# Altium PCB LED_Matrix16x16.PcbDoc
Units mm, origin at the board's own origin, x right, y up, seen from the top; angles counter-clockwise.
Board outline 132 x 132 mm, 2 copper layers (Top Layer, Bottom Layer), stack 1.586 mm thick; 258 components, 32 nets, 548 pads, 274 vias.
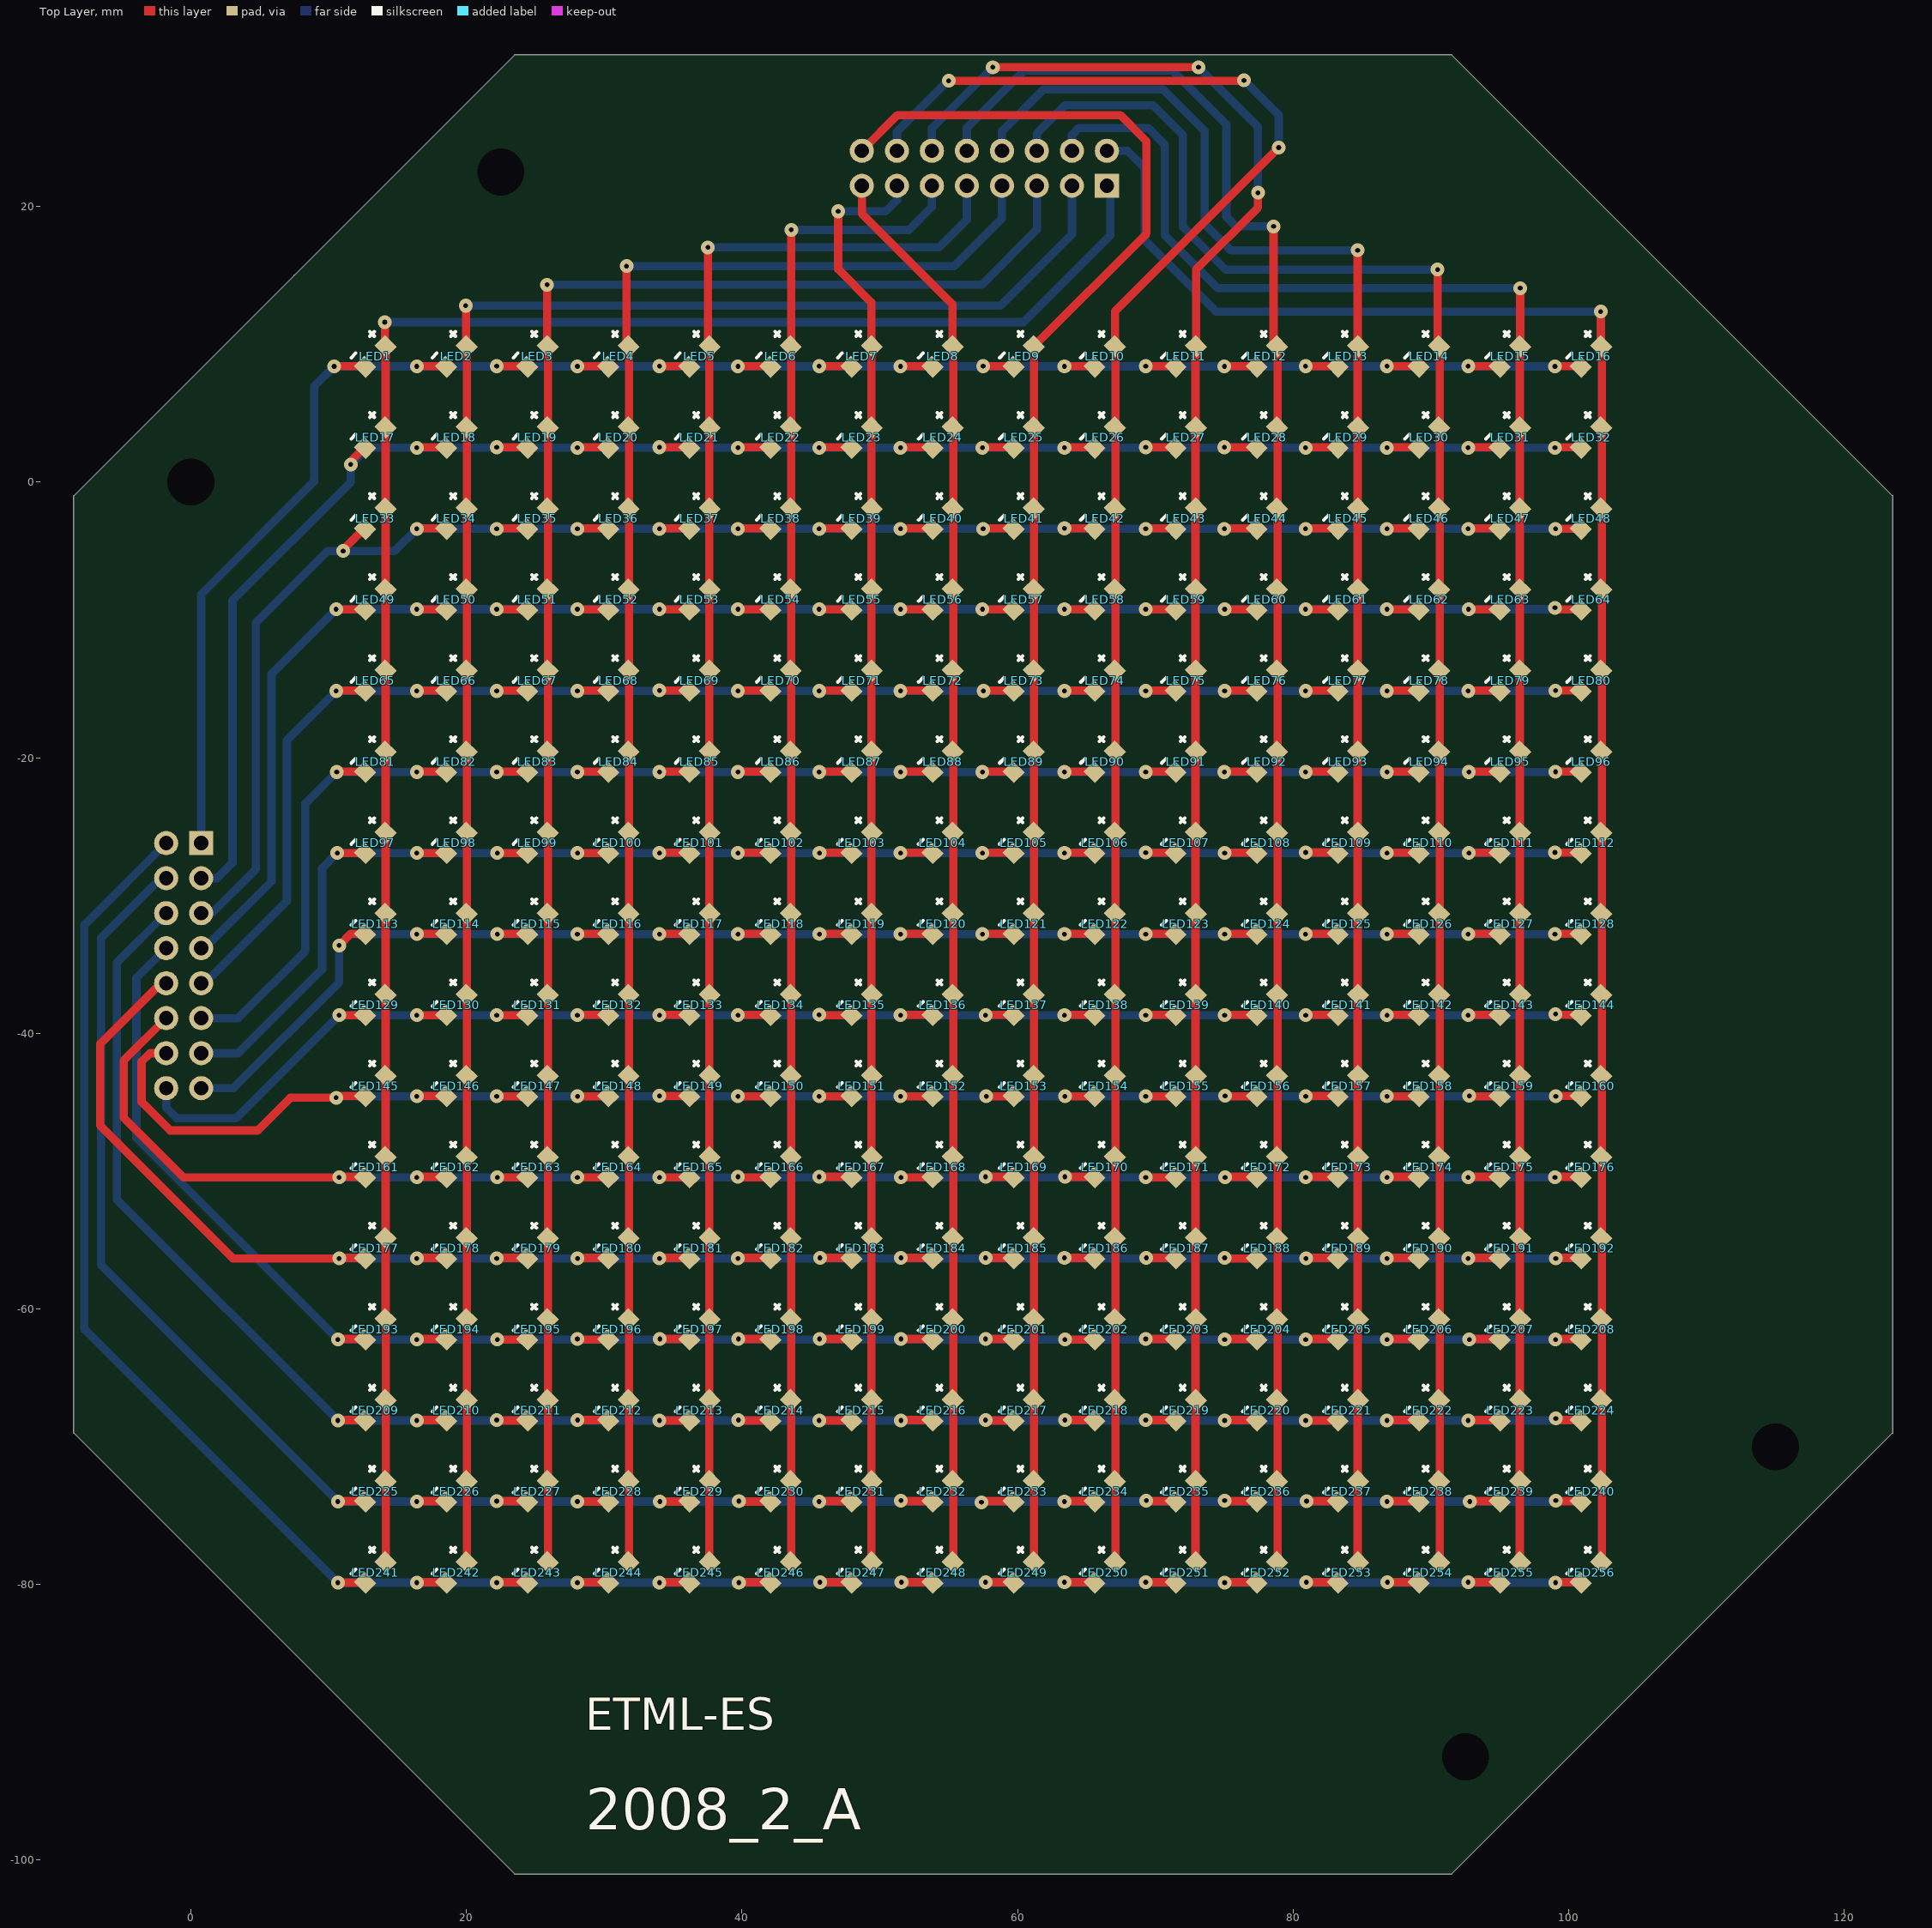
[diagram p0: Top Layer view]
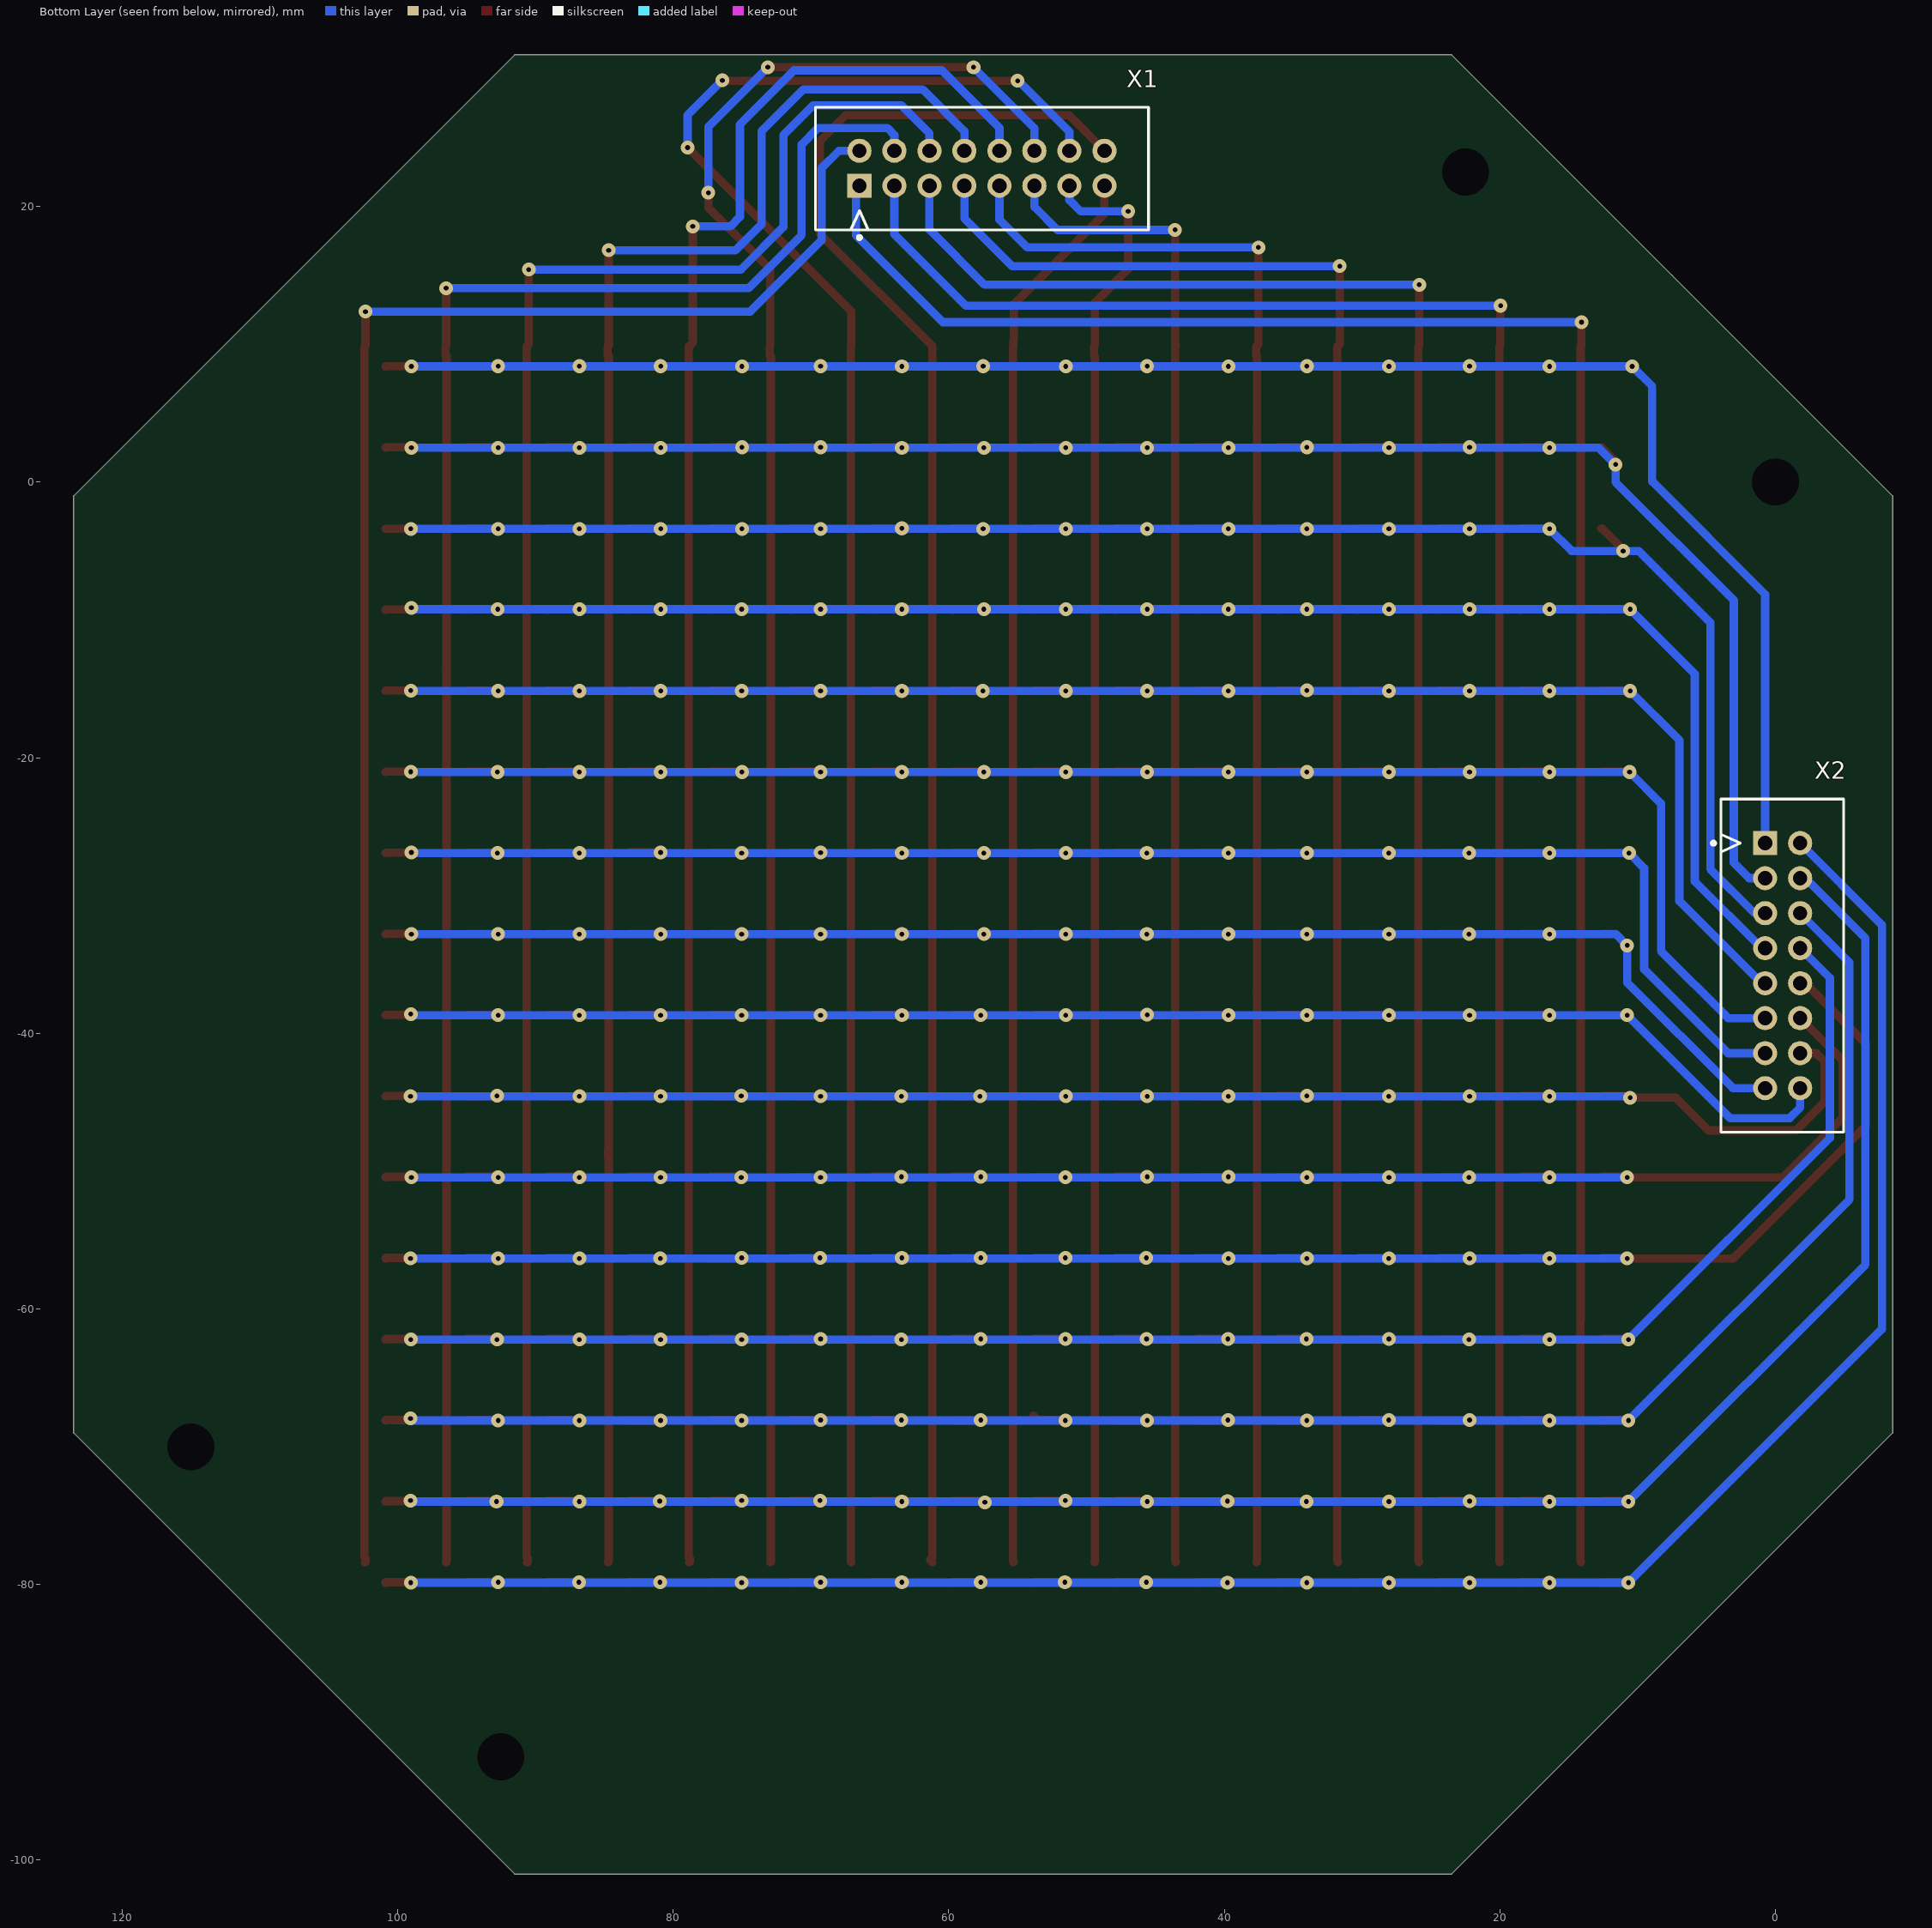
[diagram p1: Bottom Layer view, seen from below]
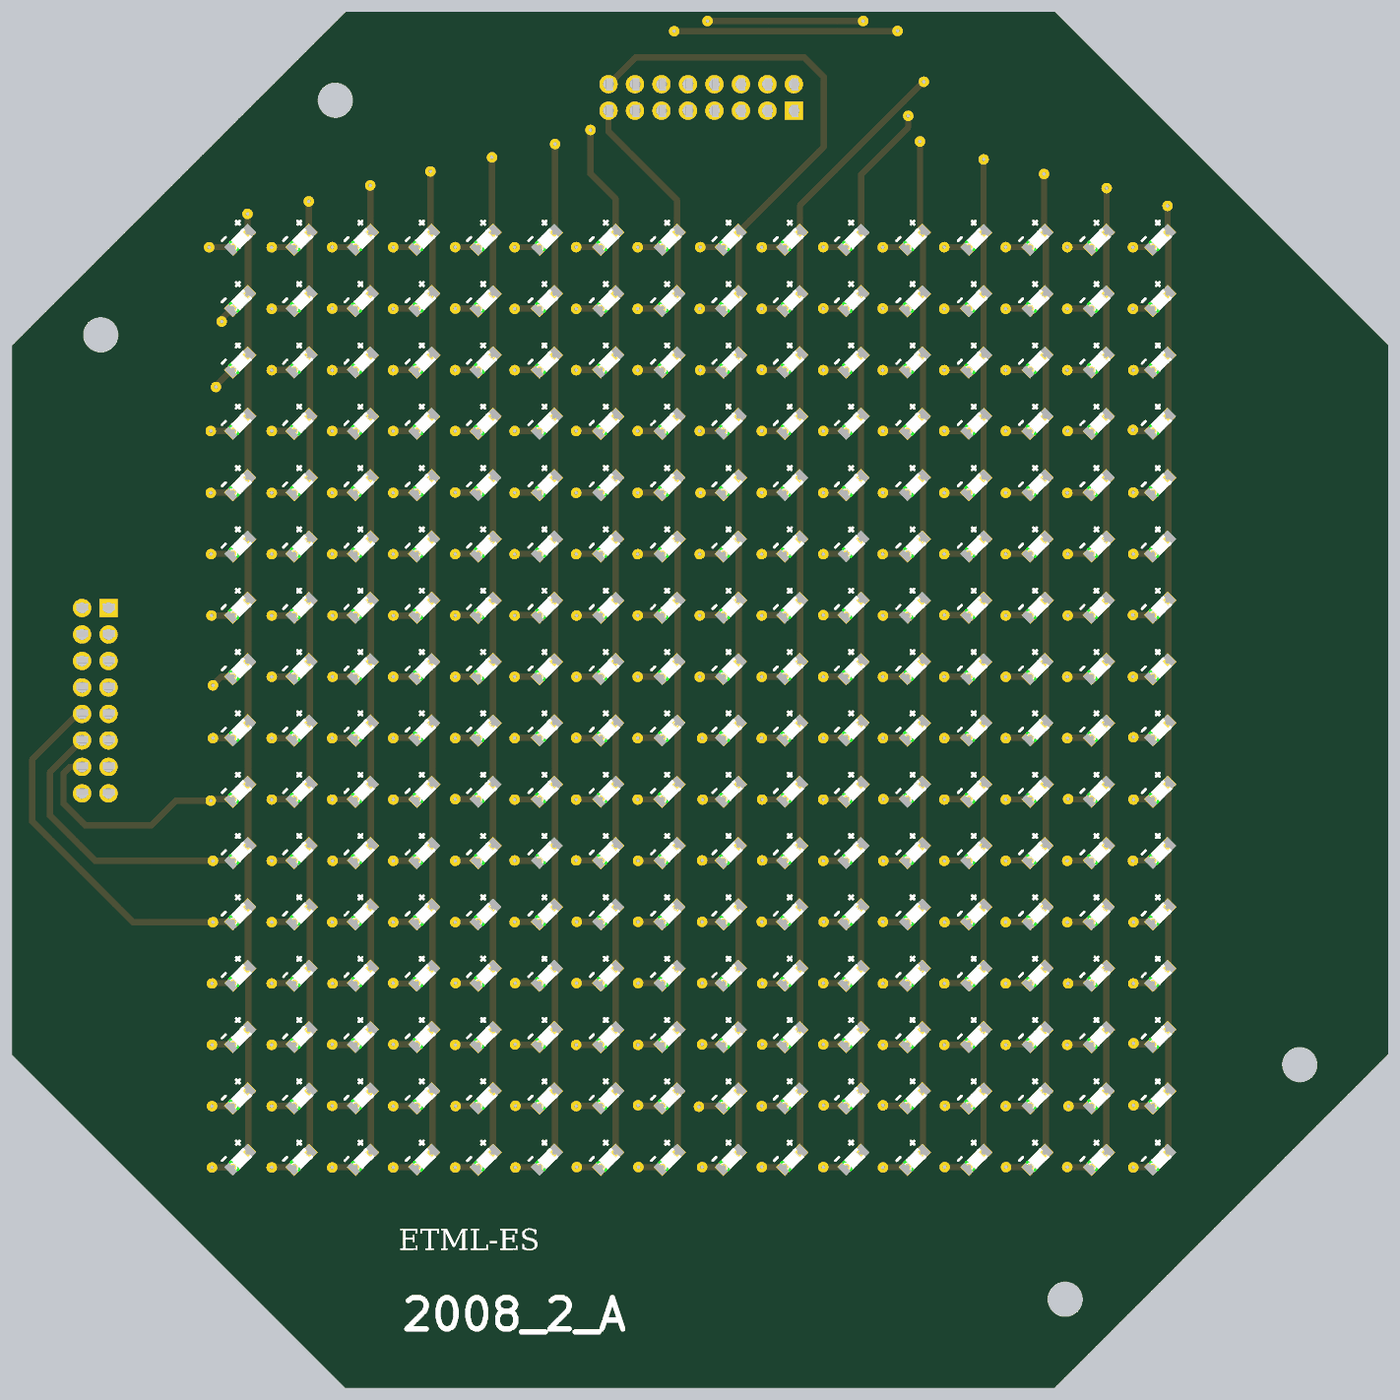
[diagram p2: 3D render of the assembled board from above, using the file's embedded part models]

## Layer stack, top to bottom
Top Solder: solder mask 0.0102, Solder Resist, Dk 3.5
Top Layer: signal copper 0.018
Dielectric1: core 1.55, FR-4, Dk 4.8
Bottom Layer: signal copper 0.018
Bottom Solder: solder mask 0.0102, Solder Resist, Dk 3.5

## Board outline
-8.5,-69 -8.5,-1 7.5,15 23.5,31 91.5,31 123.5,-1 123.5,-69 91.5,-101 23.5,-101

## Design rules (kind name [scope] priority, off if disabled: settings)
BoardOutlineClearance [All] p1: gap=0.25 ignorepadtopadclearanceinfootprint=FALSE except(0: Arc-SplitContinuation Track-SplitContinuation SMDPad-SplitContinuation THPad-SplitContinuation Via-SplitContinuation Fill-SplitContinuation Poly-SplitContinuation Region-SplitContinuation Text-SplitContinuation)
Clearance Clearance-xPP-xTP-xTT [All] p1: gap=0.15 ignorepadtopadclearanceinfootprint=FALSE except(0: Arc-Hole Track-Hole SMDPad-Hole THPad-Hole Via-Hole Fill-Hole Poly-Hole Region-Hole Text-Hole)
ComponentClearance [All] p1: gap=0.25 collisioncheckmode=3 verticalgap=0.25 showdistances=FALSE
DiffPairsRouting [All] p1: maxlimit=0.25 minlimit=0.25 mostfreqgap=0.25 toplayer_minwidth=0.381 toplayer_maxwidth=0.381 toplayer_prefwidth=0.381 bottomlayer_minwidth=0.381 bottomlayer_maxwidth=0.381 bottomlayer_prefwidth=0.381 maxuncoupledlength=12.5
Height [All] p1: minheight=0 maxheight=25 prefheight=12.5
HoleSize HoleSize-PTH [All] p1: absolutevalues=TRUE maxlimit=10 minlimit=0.25 maxpercent=80.000 minpercent=20.000
HoleToHoleClearance [All] p1: gap=0.35 allowstackedmicrovias=TRUE
MinimumAnnularRing "Minimum IAR  >0.45mm" [((ObjectKind = 'Pad') OR (ObjectKind = 'Via')) And (Layer = 'MultiLayer') And (HoleDiameter > AsMM(0.45))] p1: minimumring=0.175 // minimum inner annular ring for pads > 0.45mm finished hole size
MinimumAnnularRing "Minimum IAR <=0.45mm" [((ObjectKind = 'Pad') OR (ObjectKind = 'Via')) And (Layer = 'MultiLayer') And (HoleDiameter <= AsMM(0.45))] p2: minimumring=0.175 // minimum inner annular ring for pads <= 0.45mm finished hole size
MinimumSolderMaskSliver [All] p1: minsoldermaskwidth=0.08
PasteMaskExpansion [All] p1: expansion=-0.025
PlaneClearance PlaneClearance-IPI [All] p1: clearance=0.25
PlaneConnect [All] p1: planeconnectstyle=Relief reliefexpansion=0.175 reliefentries=4 reliefconductorwidth=0.2 reliefairgap=0.2
PolygonConnect PolygonConnect-xTW [All] p1: connectstyle=Relief reliefconductorwidth=0.2 reliefentries=4 polygonreliefangle="90 Angle" airgapwidth=0.2
RoutingCorners [All] p1: cornerstyle=45-Degree minsetback=2.5 maxsetback=2.5
RoutingVias RoutingViasES [All] p1: holewidth=0.3 width=0.65 viastyle="Through Hole" minholewidth=0.25 minwidth=0.61 maxholewidth=0.45 maxwidth=0.8 // finishet hole size <= 0.45mm
SilkToSilkClearance [All] p1: silktosilkclearance=0.2
SilkToSolderMaskClearance SilkscreenOverComponentPads [IsPad] p1: minsilkscreentomaskgap=0.2 clearancetoexposedcopper=TRUE
SolderMaskExpansion [All] p1: expansion=0
UnRoutedNet [All] p1: checkbadconnections=TRUE
Width Width-xTW [All] p1: maxlimit=1.5 minlimit=0.15 preferedwidth=0.2
17 further rules are at their usual default settings.

## Components (designator, comment, footprint, x,y, rotation, side; value= is the part's Value field where it differs from the comment)
LED1 "KPT-2012SRC-PRV" 0805_LED 13.382,9.118 r45 top
LED2 "KPT-2012SRC-PRV" 0805_LED 19.265,9.118 r45 top
LED3 "KPT-2012SRC-PRV" 0805_LED 25.147,9.118 r45 top
LED4 "KPT-2012SRC-PRV" 0805_LED 31.029,9.118 r45 top
LED5 "KPT-2012SRC-PRV" 0805_LED 36.912,9.118 r45 top
LED6 "KPT-2012SRC-PRV" 0805_LED 42.794,9.118 r45 top
LED7 "KPT-2012SRC-PRV" 0805_LED 48.676,9.118 r45 top
LED8 "KPT-2012SRC-PRV" 0805_LED 54.559,9.118 r45 top
LED9 "KPT-2012SRC-PRV" 0805_LED 60.441,9.118 r45 top
LED10 "KPT-2012SRC-PRV" 0805_LED 66.324,9.118 r45 top
LED11 "KPT-2012SRC-PRV" 0805_LED 72.206,9.118 r45 top
LED12 "KPT-2012SRC-PRV" 0805_LED 78.088,9.118 r45 top
LED13 "KPT-2012SRC-PRV" 0805_LED 83.971,9.118 r45 top
LED14 "KPT-2012SRC-PRV" 0805_LED 89.853,9.118 r45 top
LED15 "KPT-2012SRC-PRV" 0805_LED 95.735,9.118 r45 top
LED16 "KPT-2012SRC-PRV" 0805_LED 101.618,9.118 r45 top
LED17 "KPT-2012SRC-PRV" 0805_LED 13.382,3.235 r45 top
LED18 "KPT-2012SRC-PRV" 0805_LED 19.265,3.235 r45 top
LED19 "KPT-2012SRC-PRV" 0805_LED 25.147,3.235 r45 top
LED20 "KPT-2012SRC-PRV" 0805_LED 31.029,3.235 r45 top
LED21 "KPT-2012SRC-PRV" 0805_LED 36.912,3.235 r45 top
LED22 "KPT-2012SRC-PRV" 0805_LED 42.794,3.235 r45 top
LED23 "KPT-2012SRC-PRV" 0805_LED 48.676,3.235 r45 top
LED24 "KPT-2012SRC-PRV" 0805_LED 54.559,3.235 r45 top
LED25 "KPT-2012SRC-PRV" 0805_LED 60.441,3.235 r45 top
LED26 "KPT-2012SRC-PRV" 0805_LED 66.324,3.235 r45 top
LED27 "KPT-2012SRC-PRV" 0805_LED 72.206,3.235 r45 top
LED28 "KPT-2012SRC-PRV" 0805_LED 78.088,3.235 r45 top
LED29 "KPT-2012SRC-PRV" 0805_LED 83.971,3.235 r45 top
LED30 "KPT-2012SRC-PRV" 0805_LED 89.853,3.235 r45 top
LED31 "KPT-2012SRC-PRV" 0805_LED 95.735,3.235 r45 top
LED32 "KPT-2012SRC-PRV" 0805_LED 101.618,3.235 r45 top
LED33 "KPT-2012SRC-PRV" 0805_LED 13.382,-2.647 r45 top
LED34 "KPT-2012SRC-PRV" 0805_LED 19.265,-2.647 r45 top
LED35 "KPT-2012SRC-PRV" 0805_LED 25.147,-2.647 r45 top
LED36 "KPT-2012SRC-PRV" 0805_LED 31.029,-2.647 r45 top
LED37 "KPT-2012SRC-PRV" 0805_LED 36.912,-2.647 r45 top
LED38 "KPT-2012SRC-PRV" 0805_LED 42.794,-2.647 r45 top
LED39 "KPT-2012SRC-PRV" 0805_LED 48.676,-2.647 r45 top
LED40 "KPT-2012SRC-PRV" 0805_LED 54.559,-2.647 r45 top
LED41 "KPT-2012SRC-PRV" 0805_LED 60.441,-2.647 r45 top
LED42 "KPT-2012SRC-PRV" 0805_LED 66.324,-2.647 r45 top
LED43 "KPT-2012SRC-PRV" 0805_LED 72.206,-2.647 r45 top
LED44 "KPT-2012SRC-PRV" 0805_LED 78.088,-2.647 r45 top
LED45 "KPT-2012SRC-PRV" 0805_LED 83.971,-2.647 r45 top
LED46 "KPT-2012SRC-PRV" 0805_LED 89.853,-2.647 r45 top
LED47 "KPT-2012SRC-PRV" 0805_LED 95.735,-2.647 r45 top
LED48 "KPT-2012SRC-PRV" 0805_LED 101.618,-2.647 r45 top
LED49 "KPT-2012SRC-PRV" 0805_LED 13.382,-8.529 r45 top
LED50 "KPT-2012SRC-PRV" 0805_LED 19.265,-8.529 r45 top
LED51 "KPT-2012SRC-PRV" 0805_LED 25.147,-8.529 r45 top
LED52 "KPT-2012SRC-PRV" 0805_LED 31.029,-8.529 r45 top
LED53 "KPT-2012SRC-PRV" 0805_LED 36.912,-8.529 r45 top
LED54 "KPT-2012SRC-PRV" 0805_LED 42.794,-8.529 r45 top
LED55 "KPT-2012SRC-PRV" 0805_LED 48.676,-8.529 r45 top
LED56 "KPT-2012SRC-PRV" 0805_LED 54.559,-8.529 r45 top
LED57 "KPT-2012SRC-PRV" 0805_LED 60.441,-8.529 r45 top
LED58 "KPT-2012SRC-PRV" 0805_LED 66.324,-8.529 r45 top
LED59 "KPT-2012SRC-PRV" 0805_LED 72.206,-8.529 r45 top
LED60 "KPT-2012SRC-PRV" 0805_LED 78.088,-8.529 r45 top
LED61 "KPT-2012SRC-PRV" 0805_LED 83.971,-8.529 r45 top
LED62 "KPT-2012SRC-PRV" 0805_LED 89.853,-8.529 r45 top
LED63 "KPT-2012SRC-PRV" 0805_LED 95.735,-8.529 r45 top
LED64 "KPT-2012SRC-PRV" 0805_LED 101.618,-8.529 r45 top
LED65 "KPT-2012SRC-PRV" 0805_LED 13.382,-14.412 r45 top
LED66 "KPT-2012SRC-PRV" 0805_LED 19.265,-14.412 r45 top
LED67 "KPT-2012SRC-PRV" 0805_LED 25.147,-14.412 r45 top
LED68 "KPT-2012SRC-PRV" 0805_LED 31.029,-14.412 r45 top
LED69 "KPT-2012SRC-PRV" 0805_LED 36.912,-14.412 r45 top
LED70 "KPT-2012SRC-PRV" 0805_LED 42.794,-14.412 r45 top
LED71 "KPT-2012SRC-PRV" 0805_LED 48.676,-14.412 r45 top
LED72 "KPT-2012SRC-PRV" 0805_LED 54.559,-14.412 r45 top
LED73 "KPT-2012SRC-PRV" 0805_LED 60.441,-14.412 r45 top
LED74 "KPT-2012SRC-PRV" 0805_LED 66.324,-14.412 r45 top
LED75 "KPT-2012SRC-PRV" 0805_LED 72.206,-14.412 r45 top
LED76 "KPT-2012SRC-PRV" 0805_LED 78.088,-14.412 r45 top
LED77 "KPT-2012SRC-PRV" 0805_LED 83.971,-14.412 r45 top
LED78 "KPT-2012SRC-PRV" 0805_LED 89.853,-14.412 r45 top
LED79 "KPT-2012SRC-PRV" 0805_LED 95.735,-14.412 r45 top
LED80 "KPT-2012SRC-PRV" 0805_LED 101.618,-14.412 r45 top
LED81 "KPT-2012SRC-PRV" 0805_LED 13.382,-20.294 r45 top
LED82 "KPT-2012SRC-PRV" 0805_LED 19.265,-20.294 r45 top
LED83 "KPT-2012SRC-PRV" 0805_LED 25.147,-20.294 r45 top
LED84 "KPT-2012SRC-PRV" 0805_LED 31.029,-20.294 r45 top
LED85 "KPT-2012SRC-PRV" 0805_LED 36.912,-20.294 r45 top
LED86 "KPT-2012SRC-PRV" 0805_LED 42.794,-20.294 r45 top
LED87 "KPT-2012SRC-PRV" 0805_LED 48.676,-20.294 r45 top
LED88 "KPT-2012SRC-PRV" 0805_LED 54.559,-20.294 r45 top
LED89 "KPT-2012SRC-PRV" 0805_LED 60.441,-20.294 r45 top
LED90 "KPT-2012SRC-PRV" 0805_LED 66.324,-20.294 r45 top
LED91 "KPT-2012SRC-PRV" 0805_LED 72.206,-20.294 r45 top
LED92 "KPT-2012SRC-PRV" 0805_LED 78.088,-20.294 r45 top
LED93 "KPT-2012SRC-PRV" 0805_LED 83.971,-20.294 r45 top
LED94 "KPT-2012SRC-PRV" 0805_LED 89.853,-20.294 r45 top
LED95 "KPT-2012SRC-PRV" 0805_LED 95.735,-20.294 r45 top
LED96 "KPT-2012SRC-PRV" 0805_LED 101.618,-20.294 r45 top
LED97 "KPT-2012SRC-PRV" 0805_LED 13.382,-26.176 r45 top
LED98 "KPT-2012SRC-PRV" 0805_LED 19.265,-26.176 r45 top
LED99 "KPT-2012SRC-PRV" 0805_LED 25.147,-26.176 r45 top
LED100 "KPT-2012SRC-PRV" 0805_LED 31.029,-26.176 r45 top
LED101 "KPT-2012SRC-PRV" 0805_LED 36.912,-26.176 r45 top
LED102 "KPT-2012SRC-PRV" 0805_LED 42.794,-26.176 r45 top
LED103 "KPT-2012SRC-PRV" 0805_LED 48.676,-26.176 r45 top
LED104 "KPT-2012SRC-PRV" 0805_LED 54.559,-26.176 r45 top
LED105 "KPT-2012SRC-PRV" 0805_LED 60.441,-26.176 r45 top
LED106 "KPT-2012SRC-PRV" 0805_LED 66.324,-26.176 r45 top
LED107 "KPT-2012SRC-PRV" 0805_LED 72.206,-26.176 r45 top
LED108 "KPT-2012SRC-PRV" 0805_LED 78.088,-26.176 r45 top
LED109 "KPT-2012SRC-PRV" 0805_LED 83.971,-26.176 r45 top
LED110 "KPT-2012SRC-PRV" 0805_LED 89.853,-26.176 r45 top
LED111 "KPT-2012SRC-PRV" 0805_LED 95.735,-26.176 r45 top
LED112 "KPT-2012SRC-PRV" 0805_LED 101.618,-26.176 r45 top
LED113 "KPT-2012SRC-PRV" 0805_LED 13.382,-32.059 r45 top
LED114 "KPT-2012SRC-PRV" 0805_LED 19.265,-32.059 r45 top
LED115 "KPT-2012SRC-PRV" 0805_LED 25.147,-32.059 r45 top
LED116 "KPT-2012SRC-PRV" 0805_LED 31.029,-32.059 r45 top
LED117 "KPT-2012SRC-PRV" 0805_LED 36.912,-32.059 r45 top
LED118 "KPT-2012SRC-PRV" 0805_LED 42.794,-32.059 r45 top
LED119 "KPT-2012SRC-PRV" 0805_LED 48.676,-32.059 r45 top
LED120 "KPT-2012SRC-PRV" 0805_LED 54.559,-32.059 r45 top
LED121 "KPT-2012SRC-PRV" 0805_LED 60.441,-32.059 r45 top
LED122 "KPT-2012SRC-PRV" 0805_LED 66.324,-32.059 r45 top
LED123 "KPT-2012SRC-PRV" 0805_LED 72.206,-32.059 r45 top
LED124 "KPT-2012SRC-PRV" 0805_LED 78.088,-32.059 r45 top
LED125 "KPT-2012SRC-PRV" 0805_LED 83.971,-32.059 r45 top
LED126 "KPT-2012SRC-PRV" 0805_LED 89.853,-32.059 r45 top
LED127 "KPT-2012SRC-PRV" 0805_LED 95.735,-32.059 r45 top
LED128 "KPT-2012SRC-PRV" 0805_LED 101.618,-32.059 r45 top
LED129 "KPT-2012SRC-PRV" 0805_LED 13.382,-37.941 r45 top
LED130 "KPT-2012SRC-PRV" 0805_LED 19.265,-37.941 r45 top
LED131 "KPT-2012SRC-PRV" 0805_LED 25.147,-37.941 r45 top
LED132 "KPT-2012SRC-PRV" 0805_LED 31.029,-37.941 r45 top
LED133 "KPT-2012SRC-PRV" 0805_LED 36.912,-37.941 r45 top
LED134 "KPT-2012SRC-PRV" 0805_LED 42.794,-37.941 r45 top
LED135 "KPT-2012SRC-PRV" 0805_LED 48.676,-37.941 r45 top
LED136 "KPT-2012SRC-PRV" 0805_LED 54.559,-37.941 r45 top
LED137 "KPT-2012SRC-PRV" 0805_LED 60.441,-37.941 r45 top
LED138 "KPT-2012SRC-PRV" 0805_LED 66.324,-37.941 r45 top
LED139 "KPT-2012SRC-PRV" 0805_LED 72.206,-37.941 r45 top
LED140 "KPT-2012SRC-PRV" 0805_LED 78.088,-37.941 r45 top
LED141 "KPT-2012SRC-PRV" 0805_LED 83.971,-37.941 r45 top
LED142 "KPT-2012SRC-PRV" 0805_LED 89.853,-37.941 r45 top
LED143 "KPT-2012SRC-PRV" 0805_LED 95.735,-37.941 r45 top
LED144 "KPT-2012SRC-PRV" 0805_LED 101.618,-37.941 r45 top
LED145 "KPT-2012SRC-PRV" 0805_LED 13.382,-43.824 r45 top
LED146 "KPT-2012SRC-PRV" 0805_LED 19.265,-43.824 r45 top
LED147 "KPT-2012SRC-PRV" 0805_LED 25.147,-43.824 r45 top
LED148 "KPT-2012SRC-PRV" 0805_LED 31.029,-43.824 r45 top
LED149 "KPT-2012SRC-PRV" 0805_LED 36.912,-43.824 r45 top
LED150 "KPT-2012SRC-PRV" 0805_LED 42.794,-43.824 r45 top
LED151 "KPT-2012SRC-PRV" 0805_LED 48.676,-43.824 r45 top
LED152 "KPT-2012SRC-PRV" 0805_LED 54.559,-43.824 r45 top
LED153 "KPT-2012SRC-PRV" 0805_LED 60.441,-43.824 r45 top
LED154 "KPT-2012SRC-PRV" 0805_LED 66.324,-43.824 r45 top
LED155 "KPT-2012SRC-PRV" 0805_LED 72.206,-43.824 r45 top
LED156 "KPT-2012SRC-PRV" 0805_LED 78.088,-43.824 r45 top
LED157 "KPT-2012SRC-PRV" 0805_LED 83.971,-43.824 r45 top
LED158 "KPT-2012SRC-PRV" 0805_LED 89.853,-43.824 r45 top
LED159 "KPT-2012SRC-PRV" 0805_LED 95.735,-43.824 r45 top
LED160 "KPT-2012SRC-PRV" 0805_LED 101.618,-43.824 r45 top
LED161 "KPT-2012SRC-PRV" 0805_LED 13.382,-49.706 r45 top
LED162 "KPT-2012SRC-PRV" 0805_LED 19.265,-49.706 r45 top
LED163 "KPT-2012SRC-PRV" 0805_LED 25.147,-49.706 r45 top
LED164 "KPT-2012SRC-PRV" 0805_LED 31.029,-49.706 r45 top
LED165 "KPT-2012SRC-PRV" 0805_LED 36.912,-49.706 r45 top
LED166 "KPT-2012SRC-PRV" 0805_LED 42.794,-49.706 r45 top
LED167 "KPT-2012SRC-PRV" 0805_LED 48.676,-49.706 r45 top
LED168 "KPT-2012SRC-PRV" 0805_LED 54.559,-49.706 r45 top
LED169 "KPT-2012SRC-PRV" 0805_LED 60.441,-49.706 r45 top
LED170 "KPT-2012SRC-PRV" 0805_LED 66.324,-49.706 r45 top
LED171 "KPT-2012SRC-PRV" 0805_LED 72.206,-49.706 r45 top
LED172 "KPT-2012SRC-PRV" 0805_LED 78.088,-49.706 r45 top
LED173 "KPT-2012SRC-PRV" 0805_LED 83.971,-49.706 r45 top
LED174 "KPT-2012SRC-PRV" 0805_LED 89.853,-49.706 r45 top
LED175 "KPT-2012SRC-PRV" 0805_LED 95.735,-49.706 r45 top
LED176 "KPT-2012SRC-PRV" 0805_LED 101.618,-49.706 r45 top
LED177 "KPT-2012SRC-PRV" 0805_LED 13.382,-55.588 r45 top
LED178 "KPT-2012SRC-PRV" 0805_LED 19.265,-55.588 r45 top
LED179 "KPT-2012SRC-PRV" 0805_LED 25.147,-55.588 r45 top
LED180 "KPT-2012SRC-PRV" 0805_LED 31.029,-55.588 r45 top
LED181 "KPT-2012SRC-PRV" 0805_LED 36.912,-55.588 r45 top
LED182 "KPT-2012SRC-PRV" 0805_LED 42.794,-55.588 r45 top
LED183 "KPT-2012SRC-PRV" 0805_LED 48.676,-55.588 r45 top
LED184 "KPT-2012SRC-PRV" 0805_LED 54.559,-55.588 r45 top
LED185 "KPT-2012SRC-PRV" 0805_LED 60.441,-55.588 r45 top
LED186 "KPT-2012SRC-PRV" 0805_LED 66.324,-55.588 r45 top
LED187 "KPT-2012SRC-PRV" 0805_LED 72.206,-55.588 r45 top
LED188 "KPT-2012SRC-PRV" 0805_LED 78.088,-55.588 r45 top
LED189 "KPT-2012SRC-PRV" 0805_LED 83.971,-55.588 r45 top
LED190 "KPT-2012SRC-PRV" 0805_LED 89.853,-55.588 r45 top
LED191 "KPT-2012SRC-PRV" 0805_LED 95.735,-55.588 r45 top
LED192 "KPT-2012SRC-PRV" 0805_LED 101.618,-55.588 r45 top
LED193 "KPT-2012SRC-PRV" 0805_LED 13.382,-61.471 r45 top
LED194 "KPT-2012SRC-PRV" 0805_LED 19.265,-61.471 r45 top
LED195 "KPT-2012SRC-PRV" 0805_LED 25.147,-61.471 r45 top
LED196 "KPT-2012SRC-PRV" 0805_LED 31.029,-61.471 r45 top
LED197 "KPT-2012SRC-PRV" 0805_LED 36.912,-61.471 r45 top
LED198 "KPT-2012SRC-PRV" 0805_LED 42.794,-61.471 r45 top
LED199 "KPT-2012SRC-PRV" 0805_LED 48.676,-61.471 r45 top
LED200 "KPT-2012SRC-PRV" 0805_LED 54.559,-61.471 r45 top
LED201 "KPT-2012SRC-PRV" 0805_LED 60.441,-61.471 r45 top
LED202 "KPT-2012SRC-PRV" 0805_LED 66.324,-61.471 r45 top
LED203 "KPT-2012SRC-PRV" 0805_LED 72.206,-61.471 r45 top
LED204 "KPT-2012SRC-PRV" 0805_LED 78.088,-61.471 r45 top
LED205 "KPT-2012SRC-PRV" 0805_LED 83.971,-61.471 r45 top
LED206 "KPT-2012SRC-PRV" 0805_LED 89.853,-61.471 r45 top
LED207 "KPT-2012SRC-PRV" 0805_LED 95.735,-61.471 r45 top
LED208 "KPT-2012SRC-PRV" 0805_LED 101.618,-61.471 r45 top
LED209 "KPT-2012SRC-PRV" 0805_LED 13.382,-67.353 r45 top
LED210 "KPT-2012SRC-PRV" 0805_LED 19.265,-67.353 r45 top
LED211 "KPT-2012SRC-PRV" 0805_LED 25.147,-67.353 r45 top
LED212 "KPT-2012SRC-PRV" 0805_LED 31.029,-67.353 r45 top
LED213 "KPT-2012SRC-PRV" 0805_LED 36.912,-67.353 r45 top
LED214 "KPT-2012SRC-PRV" 0805_LED 42.794,-67.353 r45 top
LED215 "KPT-2012SRC-PRV" 0805_LED 48.676,-67.353 r45 top
LED216 "KPT-2012SRC-PRV" 0805_LED 54.559,-67.353 r45 top
LED217 "KPT-2012SRC-PRV" 0805_LED 60.441,-67.353 r45 top
LED218 "KPT-2012SRC-PRV" 0805_LED 66.324,-67.353 r45 top
LED219 "KPT-2012SRC-PRV" 0805_LED 72.206,-67.353 r45 top
LED220 "KPT-2012SRC-PRV" 0805_LED 78.088,-67.353 r45 top
LED221 "KPT-2012SRC-PRV" 0805_LED 83.971,-67.353 r45 top
LED222 "KPT-2012SRC-PRV" 0805_LED 89.853,-67.353 r45 top
LED223 "KPT-2012SRC-PRV" 0805_LED 95.735,-67.353 r45 top
LED224 "KPT-2012SRC-PRV" 0805_LED 101.618,-67.353 r45 top
LED225 "KPT-2012SRC-PRV" 0805_LED 13.382,-73.235 r45 top
LED226 "KPT-2012SRC-PRV" 0805_LED 19.265,-73.235 r45 top
LED227 "KPT-2012SRC-PRV" 0805_LED 25.147,-73.235 r45 top
LED228 "KPT-2012SRC-PRV" 0805_LED 31.029,-73.235 r45 top
LED229 "KPT-2012SRC-PRV" 0805_LED 36.912,-73.235 r45 top
LED230 "KPT-2012SRC-PRV" 0805_LED 42.794,-73.235 r45 top
LED231 "KPT-2012SRC-PRV" 0805_LED 48.676,-73.235 r45 top
LED232 "KPT-2012SRC-PRV" 0805_LED 54.559,-73.235 r45 top
LED233 "KPT-2012SRC-PRV" 0805_LED 60.441,-73.235 r45 top
LED234 "KPT-2012SRC-PRV" 0805_LED 66.324,-73.235 r45 top
LED235 "KPT-2012SRC-PRV" 0805_LED 72.206,-73.235 r45 top
LED236 "KPT-2012SRC-PRV" 0805_LED 78.088,-73.235 r45 top
LED237 "KPT-2012SRC-PRV" 0805_LED 83.971,-73.235 r45 top
LED238 "KPT-2012SRC-PRV" 0805_LED 89.853,-73.235 r45 top
LED239 "KPT-2012SRC-PRV" 0805_LED 95.735,-73.235 r45 top
LED240 "KPT-2012SRC-PRV" 0805_LED 101.618,-73.235 r45 top
LED241 "KPT-2012SRC-PRV" 0805_LED 13.382,-79.118 r45 top
LED242 "KPT-2012SRC-PRV" 0805_LED 19.265,-79.118 r45 top
LED243 "KPT-2012SRC-PRV" 0805_LED 25.147,-79.118 r45 top
LED244 "KPT-2012SRC-PRV" 0805_LED 31.029,-79.118 r45 top
LED245 "KPT-2012SRC-PRV" 0805_LED 36.912,-79.118 r45 top
LED246 "KPT-2012SRC-PRV" 0805_LED 42.794,-79.118 r45 top
LED247 "KPT-2012SRC-PRV" 0805_LED 48.676,-79.118 r45 top
LED248 "KPT-2012SRC-PRV" 0805_LED 54.559,-79.118 r45 top
LED249 "KPT-2012SRC-PRV" 0805_LED 60.441,-79.118 r45 top
LED250 "KPT-2012SRC-PRV" 0805_LED 66.324,-79.118 r45 top
LED251 "KPT-2012SRC-PRV" 0805_LED 72.206,-79.118 r45 top
LED252 "KPT-2012SRC-PRV" 0805_LED 78.088,-79.118 r45 top
LED253 "KPT-2012SRC-PRV" 0805_LED 83.971,-79.118 r45 top
LED254 "KPT-2012SRC-PRV" 0805_LED 89.853,-79.118 r45 top
LED255 "KPT-2012SRC-PRV" 0805_LED 95.735,-79.118 r45 top
LED256 "KPT-2012SRC-PRV" 0805_LED 101.618,-79.118 r45 top
X1 "Anodes" CON8X8(EDITED) 66.48,21.5 r180 bottom
X2 "Cathodes" CON8X8(EDITED) 0.75,-26.2 r270 bottom

## Footprints (in the part's own frame and the unit in brackets; to place one, negate y for a bottom-side part, rotate by r counter-clockwise, add the part's x,y. Pads: shape width x height; smd on the part's side, far side on the other; paste and mask are expansions set on the pad)
0805_LED [mm] "Chip LED, 2-Leads, Body 2.0x1.3mm, IPC Medium Density"
  rect 1.1x1.2 smd: 1(-1.05,0) 2(1.05,0)
  silkscreen extent -1.3,1.09 1.22,1.55, body extent -1,-0.62 1,0.63, height 0.68
CON8X8(EDITED) [mm] "2.54mm pitch, 16 pin, header;shrouded"
  rect 1.75x1.75 / inner round 1.75 / far side rect 1.75x1.75 hole 1.05 mask+0: 1(0,0)
  round 1.75 hole 1.05 mask+0: 2(2.54,0) 3(5.08,0) 4(7.62,0) 5(10.16,0) 6(12.7,0) 7(15.24,0) 8(17.78,0) 9(17.78,2.54) 10(15.24,2.54) 11(12.7,2.54) 12(10.16,2.54) 13(7.62,2.54) 14(5.08,2.54) 15(2.54,2.54) 16(0,2.54)
  silkscreen extent -3.2,-3.87 20.98,5.7, body extent -1.37,-1.27 18.95,3.76, height 9.59

## Part data
X1 X2: library part "Mâle DIN 8 x 8"

## Free pads (board coordinates)
  round 1.524 hole 3.4 unplated: 2(0,0) 2(22.5,22.5) 2(92.5,-92.5) 2(115,-70)

## Via types
v1: diameter 1, hole 0.35, Top Layer to Bottom Layer, 274 vias

## Nets (pads, with @x,y where several pads share a name; then routed paths per layer and width w, separated by ;. In a path a pad name is that pad's centre, name@x,y a point inside that pad or via, vN(x,y) a via of type N, cw(c..) or ccw(c..) an arc to the next point about the centre after c; other vN are vias at no path point)
NetLED1_1: LED1.1 LED2.1 LED3.1 LED4.1 LED5.1 LED6.1 LED7.1 LED8.1 LED9.1 LED10.1 LED11.1 LED12.1 LED13.1 LED14.1 LED15.1 LED16.1 X2.1 | length 163.1
  Top Layer w0.6: v1(10.4,8.4) 10.411,8.411 12.605,8.411 LED1.1 ; v1(16.4,8.4) 16.411,8.411 18.487,8.411 LED2.1 ; v1(22.2,8.411) 24.369,8.411 LED3.1 ; v1(28.05,8.4) 28.061,8.411 30.252,8.411 LED4.1 ; v1(34,8.411) 36.134,8.411 LED5.1 ; v1(39.7,8.4) 39.711,8.411 42.016,8.411 LED6.1 ; v1(45.6,8.411) 47.899,8.411 LED7.1@47.934,8.375 ; v1(51.5,8.4) 51.511,8.411 53.781,8.411 LED8.1 ; v1(57.5,8.411) 59.663,8.411 LED9.1 ; v1(63.4,8.4) 63.411,8.411 65.546,8.411 LED10.1 ; v1(69.3,8.411) 71.428,8.411 LED11.1 ; v1(75,8.4) 75.01,8.411 77.31,8.411 LED12.1 ; v1(80.9,8.411) 83.193,8.411 LED13.1 ; v1(86.8,8.411) 89.075,8.411 LED14.1 ; v1(92.7,8.411) 94.957,8.411 LED15.1 ; v1(99,8.4) 99.01,8.411 100.84,8.411 LED16.1@100.875,8.375
  Bottom Layer w0.6: X2.1 0.75,-8.15 8.95,0.05 8.95,6.95 v1(10.4,8.4) v1(16.4,8.4) v1(28.05,8.4) v1(39.7,8.4) v1(51.5,8.4) v1(63.4,8.4) v1(75,8.4) v1(99,8.4)
NetLED1_2: LED1.2 LED17.2 LED33.2 LED49.2 LED65.2 LED81.2 LED97.2 LED113.2 LED129.2 LED145.2 LED161.2 LED177.2 LED193.2 LED209.2 LED225.2 LED241.2 X1.1 | length 219.6
  Top Layer w0.6: v1(14.075,11.6) 14.089,11.586 14.089,9.895 LED1.2 LED17.2 LED33.2 LED49.2 LED65.2 LED145.2 LED177.2 LED193.2 ; LED241.2@14.125,-78.34 LED241.2 14.16,-78.34 14.16,-66.61 14.16,-37.199 LED1.2@14.16,9.825
  Bottom Layer w0.6: v1(14.075,11.6) 60.425,11.6 66.725,17.9 66.725,21.255 X1.1
NetLED2_2: LED2.2 LED18.2 LED34.2 LED50.2 LED66.2 LED82.2 LED98.2 LED114.2 LED130.2 LED146.2 LED162.2 LED178.2 LED194.2 LED210.2 LED226.2 LED242.2 X1.2 | length 140.9
  Top Layer w0.6: v1(19.95,12.8) 19.972,12.778 19.972,9.895 LED2.2 20.043,9.825 20.043,-7.787 20.043,-13.669 20.043,-25.434 20.043,-43.081 20.043,-78.34 LED242.2
  Bottom Layer w0.6: v1(19.95,12.8) 58.749,12.8 63.94,17.991 X1.2
NetLED3_2: LED3.2 LED19.2 LED35.2 LED51.2 LED67.2 LED83.2 LED99.2 LED115.2 LED131.2 LED147.2 LED163.2 LED179.2 LED195.2 LED211.2 LED227.2 LED243.2 X1.3 | length 133.2
  Top Layer w0.6: v1(25.85,14.325) 25.85,9.9 LED3.2 25.925,9.825 25.925,-1.905 25.925,-19.552 25.925,-31.316 25.925,-48.963 25.925,-60.728 25.925,-78.269 25.854,-78.34 LED243.2
  Bottom Layer w0.6: v1(25.85,14.325) 57.4,14.325 61.4,18.325 X1.3
NetLED4_2: LED4.2 LED20.2 LED36.2 LED52.2 LED68.2 LED84.2 LED100.2 LED116.2 LED132.2 LED148.2 LED164.2 LED180.2 LED196.2 LED212.2 LED228.2 LED244.2 X1.4 | length 125.2
  Top Layer w0.6: v1(31.625,15.675) 31.625,10.007 LED4.2 31.807,9.825 31.807,-1.905 31.807,-13.669 31.807,-37.199 31.807,-66.61 31.807,-78.269 31.737,-78.34 LED244.2
  Bottom Layer w0.6: v1(31.625,15.675) 55.4,15.675 58.86,19.135 X1.4
NetLED5_2: LED5.2 LED21.2 LED37.2 LED53.2 LED69.2 LED85.2 LED101.2 LED117.2 LED133.2 LED149.2 LED165.2 LED181.2 LED197.2 LED213.2 LED229.2 LED245.2 X1.5 | length 124.6
  Top Layer w0.6: v1(37.525,17.025) 37.525,9.989 LED5.2 LED5.2@37.69,9.825 ; LED245.2 37.619,-78.34 LED133.2@37.619,-37.163 ; LED133.2 LED133.2@37.619,-37.163 ; LED37.2 LED37.2@37.619,-1.869 ; LED21.2 LED21.2@37.619,4.013 ; LED133.2@37.619,-37.163 37.619,-36.2 ; LED133.2@37.619,-37.163 37.619,-36.2 ; 37.619,-36.2 37.619,-13.669 LED37.2@37.619,-1.869 ; LED37.2@37.619,-1.869 37.619,-0.55 LED21.2@37.619,4.013 ; LED21.2@37.619,4.013 37.619,4.85 ; LED21.2@37.619,4.013 37.619,4.85 ; 37.619,4.85 37.619,9.118 ; 37.619,4.85 LED5.2@37.619,9.118 ; LED5.2@37.619,9.118 LED5.2@37.654,9.153 ; 37.619,9.118 LED5.2@37.654,9.153 ; LED5.2@37.654,9.153 LED5.2@37.69,9.188 ; LED5.2@37.654,9.153 LED5.2@37.69,9.188 ; LED5.2@37.69,9.188 LED5.2@37.69,9.825 ; LED5.2@37.69,9.188 LED5.2@37.69,9.825
  Bottom Layer w0.6: v1(37.525,17.025) 54.3,17.025 56.32,19.045 X1.5
NetLED6_2: LED6.2 LED22.2 LED38.2 LED54.2 LED70.2 LED86.2 LED102.2 LED118.2 LED134.2 LED150.2 LED166.2 LED182.2 LED198.2 LED214.2 LED230.2 LED246.2 X1.6 | length 109.2
  Top Layer w0.6: LED246.2 43.501,-78.34 43.572,-78.269 43.572,-60.728 43.572,-31.316 43.572,-13.669 43.572,-1.905 43.572,9.825 LED6.2 43.5,9.897 43.572,9.969 v1(43.572,18.3)
  Bottom Layer w0.6: v1(43.572,18.3) 52.1,18.3 53.78,19.98 X1.6
NetLED7_2: LED7.2 LED23.2 LED39.2 LED55.2 LED71.2 LED87.2 LED103.2 LED119.2 LED135.2 LED151.2 LED167.2 LED183.2 LED199.2 LED215.2 LED231.2 LED247.2 X1.7 | length 104.7
  Top Layer w0.6: v1(46.975,19.65) 46.975,15.451 49.384,13.043 49.384,9.895 LED7.2 49.454,9.825 49.454,9.188 49.384,9.118 49.384,3.978 49.384,-13.669 49.384,-25.434 49.384,-37.199 49.384,-66.61 49.384,-78.34 LED247.2
  Bottom Layer w0.6: v1(46.975,19.65) 50.425,19.65 51.24,20.465 X1.7
NetLED8_2: LED8.2 LED24.2 LED40.2 LED56.2 LED72.2 LED88.2 LED104.2 LED120.2 LED136.2 LED152.2 LED168.2 LED184.2 LED200.2 LED216.2 LED232.2 LED248.2 X1.8 | length 102.7
  Top Layer w0.6: X1.8 48.7,19.475 55.266,12.909 55.266,10.357 55.301,10.321 LED8.2 55.337,9.825 55.337,-13.669 55.337,-25.434 55.337,-43.081 55.337,-54.846 55.337,-78.269 55.266,-78.34 LED248.2
NetLED9_2: LED9.2 LED25.2 LED41.2 LED57.2 LED73.2 LED89.2 LED105.2 LED121.2 LED137.2 LED153.2 LED169.2 LED185.2 LED201.2 LED217.2 LED233.2 LED249.2 X1.9 | length 129.4
  Top Layer w0.6: X1.9 51.285,26.625 67.45,26.625 69.35,24.725 69.35,18.026 LED9.2 LED25.2 LED41.2 LED89.2 LED105.2 LED121.2 LED137.2 LED153.2 LED169.2 LED185.2 LED201.2 LED217.2 61.184,-78.042 61.35,-78.209 LED249.2
  Bottom Layer w0.6: X1.9@48.54,24.2 X1.9
NetLED10_2: LED10.2 LED26.2 LED42.2 LED58.2 LED74.2 LED90.2 LED106.2 LED122.2 LED138.2 LED154.2 LED170.2 LED186.2 LED202.2 LED218.2 LED234.2 LED250.2 X1.10 | length 141.6
  Top Layer w0.6: v1(55,29.125) 76.4,29.125 v1(76.425,29.15) ; LED250.2 67.101,-78.34 67.101,-37.199 67.101,-19.552 67.101,-1.905 67.101,9.825 LED10.2 67.066,12.391 v1(78.95,24.275)
  Bottom Layer w0.6: X1.10 51.24,25.415 54.95,29.125 v1(55,29.125) ; v1(76.425,29.15) 78.95,26.625 v1(78.95,24.275)
NetLED11_2: LED11.2 LED27.2 LED43.2 LED59.2 LED75.2 LED91.2 LED107.2 LED123.2 LED139.2 LED155.2 LED171.2 LED187.2 LED203.2 LED219.2 LED235.2 LED251.2 X1.11 | length 135.7
  Top Layer w0.6: v1(58.2,30.1) v1(73.125,30.1) ; LED251.2 72.913,-78.34 72.913,-60.728 LED171.2@72.913,-48.25 ; LED171.2 72.913,-48.928 LED171.2@72.913,-48.25 ; v1(77.45,21) 77.45,19.928 72.948,15.427 LED11.2 72.984,9.825 72.984,9.188 72.913,9.118 72.913,-13.669 72.913,-31.316 LED171.2@72.913,-48.25
  Bottom Layer w0.6: X1.11 53.78,25.68 v1(58.2,30.1) ; v1(73.125,30.1) 77.45,25.775 v1(77.45,21)
NetLED12_2: LED12.2 LED28.2 LED44.2 LED60.2 LED76.2 LED92.2 LED108.2 LED124.2 LED140.2 LED156.2 LED172.2 LED188.2 LED204.2 LED220.2 LED236.2 LED252.2 X1.12 | length 131.3
  Top Layer w0.6: v1(78.575,18.55) 78.575,10.116 LED12.2 78.866,9.825 78.866,-7.787 78.866,-31.316 78.866,-48.963 78.866,-78.042 78.795,-78.113 78.795,-78.34 LED252.2
  Bottom Layer w0.6: X1.12 56.32,25.695 60.5,29.875 71.225,29.875 75.15,25.95 75.15,19.25 75.85,18.55 v1(78.575,18.55)
NetLED13_2: LED13.2 LED29.2 LED45.2 LED61.2 LED77.2 LED93.2 LED109.2 LED125.2 LED141.2 LED157.2 LED173.2 LED189.2 LED205.2 LED221.2 LED237.2 LED253.2 X1.13 | length 133.1
  Top Layer w0.6: v1(84.678,16.825) 84.678,9.895 LED13.2 84.748,9.825 84.748,9.188 84.678,9.118 84.678,3.978 84.678,-13.669 84.678,-31.316 LED173.2@84.678,-48.475 ; LED253.2 84.678,-78.34 84.678,-60.728 LED173.2@84.678,-48.475 ; LED173.2 84.713,-48.51 LED173.2@84.678,-48.475
  Bottom Layer w0.6: X1.13 58.86,25.46 61.9,28.5 70.55,28.5 73.575,25.475 73.575,18.725 75.475,16.825 v1(84.678,16.825)
NetLED14_2: LED14.2 LED30.2 LED46.2 LED62.2 LED78.2 LED94.2 LED110.2 LED126.2 LED142.2 LED158.2 LED174.2 LED190.2 LED206.2 LED222.2 LED238.2 LED254.2 X1.14 | length 133.9
  Top Layer w0.6: v1(90.475,15.427) 90.475,9.981 LED14.2 90.631,9.825 90.631,-78.042 90.56,-78.113 90.56,-78.34 LED254.2
  Bottom Layer w0.6: X1.14 61.4,25.3 63.45,27.35 69.825,27.35 72,25.175 72,18.5 75.073,15.427 v1(90.475,15.427)
NetLED15_2: LED15.2 LED31.2 LED47.2 LED63.2 LED79.2 LED95.2 LED111.2 LED127.2 LED143.2 LED159.2 LED175.2 LED191.2 LED207.2 LED223.2 LED239.2 LED255.2 X1.15 | length 136
  Top Layer w0.6: LED255.2 96.442,-78.34 96.442,-66.61 96.442,-48.963 96.442,-31.316 96.442,-13.669 96.442,-12.775 ; LED79.2 96.442,-13.634 96.442,-12.775 ; v1(96.478,14.075) LED15.2 96.513,9.825 96.513,9.188 96.442,9.118 96.442,-1.905 96.442,-12.775
  Bottom Layer w0.6: X1.15 63.94,25.19 64.45,25.7 69.475,25.7 70.675,24.5 70.675,17.925 74.525,14.075 v1(96.478,14.075)
NetLED16_2: LED16.2 LED32.2 LED48.2 LED64.2 LED80.2 LED96.2 LED112.2 LED128.2 LED144.2 LED160.2 LED176.2 LED192.2 LED208.2 LED224.2 LED240.2 LED256.2 X1.16 | length 157.8
  Top Layer w0.6: v1(102.325,12.372) 102.325,9.895 LED16.2 102.395,9.825 LED256.2@102.395,-78.042 ; LED256.2 102.325,-78.34 102.325,-78.113 LED256.2@102.395,-78.042 ; LED192.2@102.395,-54.846 LED256.2@102.395,-78.042
  Bottom Layer w0.6: X1.16 67.96,24.04 69.225,22.775 69.225,17.55 74.403,12.372 v1(102.325,12.372)
NetLED17_1: LED17.1 LED18.1 LED19.1 LED20.1 LED21.1 LED22.1 LED23.1 LED24.1 LED25.1 LED26.1 LED27.1 LED28.1 LED29.1 LED30.1 LED31.1 LED32.1 X2.2 | length 159.1
  Top Layer w0.6: X2.2 X2.2@1.015,-28.475 ; v1(11.6,1.275) 11.6,1.524 12.605,2.528 LED17.1 ; v1(16.4,2.493) 16.435,2.528 18.487,2.528 LED18.1 ; v1(22.2,2.528) 24.369,2.528 LED19.1 ; v1(28.05,2.493) 28.085,2.528 30.252,2.528 LED20.1 ; v1(34,2.528) 36.134,2.528 LED21.1 ; v1(39.7,2.493) 39.735,2.528 42.016,2.528 LED22.1 ; v1(45.6,2.493) 45.635,2.528 47.899,2.528 LED23.1@47.934,2.493 ; v1(51.5,2.493) 51.535,2.528 53.781,2.528 LED24.1 ; v1(57.45,2.493) 57.485,2.528 59.663,2.528 LED25.1 ; v1(63.4,2.493) 63.435,2.528 65.546,2.528 LED26.1 ; v1(69.3,2.528) 71.428,2.528 LED27.1 ; v1(75,2.528) 77.31,2.528 LED28.1 ; v1(80.9,2.493) 80.935,2.528 83.193,2.528 LED29.1 ; v1(86.8,2.493) 86.835,2.528 89.075,2.528 LED30.1 ; v1(92.7,2.493) 92.735,2.528 94.957,2.528 LED31.1 ; v1(99,2.493) 99.035,2.528 100.84,2.528 LED32.1@100.875,2.493
  Bottom Layer w0.6: X2.2 1.91,-28.74 3.025,-27.625 3.025,-8.575 11.6,0 v1(11.6,1.275) 12.818,2.493 v1(16.4,2.493) v1@22.2,2.493 ; v1(22.2,2.528) v1@22.2,2.493 ; v1(34,2.528) v1@34,2.493 ; v1(99,2.493) v1(92.7,2.493) v1(86.8,2.493) v1(80.9,2.493) 75,2.493 v1(63.4,2.493) v1(57.45,2.493) v1(51.5,2.493) v1(45.6,2.493) v1(39.7,2.493) v1@34,2.493 ; v1@22.2,2.493 v1(28.05,2.493) v1@34,2.493
NetLED33_1: LED33.1 LED34.1 LED35.1 LED36.1 LED37.1 LED38.1 LED39.1 LED40.1 LED41.1 LED42.1 LED43.1 LED44.1 LED45.1 LED46.1 LED47.1 LED48.1 X2.3 | length 156.4
  Top Layer w0.6: v1(11.05,-5) 11.05,-4.909 12.605,-3.354 LED33.1 ; v1(16.4,-3.39) 16.435,-3.354 18.487,-3.354 LED34.1 ; v1(22.2,-3.39) 22.235,-3.354 24.369,-3.354 LED35.1 ; v1(28.05,-3.39) 28.085,-3.354 30.252,-3.354 LED36.1 ; v1(34,-3.39) 34.035,-3.354 36.134,-3.354 LED37.1 ; v1(39.7,-3.39) 39.735,-3.354 42.016,-3.354 LED38.1 ; v1(45.6,-3.39) 45.635,-3.354 47.899,-3.354 LED39.1@47.934,-3.39 ; v1(51.5,-3.39) 51.535,-3.354 53.781,-3.354 LED40.1 ; v1(57.5,-3.39) 57.535,-3.354 59.663,-3.354 LED41.1 ; v1(63.4,-3.354) 65.546,-3.354 LED42.1 ; v1(69.3,-3.39) 69.335,-3.354 71.428,-3.354 LED43.1 ; v1(75,-3.39) 75.035,-3.354 77.31,-3.354 LED44.1 ; v1(80.9,-3.39) 80.935,-3.354 83.193,-3.354 LED45.1 ; v1(86.8,-3.39) 86.835,-3.354 89.075,-3.354 LED46.1 ; v1(92.7,-3.39) 92.735,-3.354 94.957,-3.354 LED47.1 ; v1(99.035,-3.39) LED48.1@100.875,-3.39
  Bottom Layer w0.6: X2.3 1.52,-31.28 4.723,-28.077 4.723,-10.202 9.925,-5 v1(11.05,-5) 14.789,-5 v1(16.4,-3.39) v1(22.2,-3.39) v1(28.05,-3.39) v1(34,-3.39) v1(39.7,-3.39) v1(45.6,-3.39) v1(51.5,-3.39) v1(57.5,-3.39) v1(69.3,-3.39) v1(75,-3.39) v1(80.9,-3.39) v1(86.8,-3.39) v1(92.7,-3.39) v1(99.035,-3.39)
NetLED49_1: LED49.1 LED50.1 LED51.1 LED52.1 LED53.1 LED54.1 LED55.1 LED56.1 LED57.1 LED58.1 LED59.1 LED60.1 LED61.1 LED62.1 LED63.1 LED64.1 X2.4 | length 152.9
  Top Layer w0.6: v1(10.55,-9.225) 10.562,-9.237 12.605,-9.237 LED49.1 ; v1(16.4,-9.225) 16.412,-9.237 18.487,-9.237 LED50.1 ; v1(22.2,-9.225) 22.212,-9.237 24.369,-9.237 LED51.1 ; v1(28.05,-9.225) 28.062,-9.237 30.252,-9.237 LED52.1 ; v1(34,-9.225) 34.012,-9.237 36.134,-9.237 LED53.1 ; v1(39.7,-9.225) 39.712,-9.237 42.016,-9.237 LED54.1 ; v1(45.6,-9.225) 45.612,-9.237 47.899,-9.237 LED55.1@47.934,-9.272 ; v1(51.5,-9.225) 51.512,-9.237 53.781,-9.237 LED56.1 ; v1(57.45,-9.225) 57.462,-9.237 59.663,-9.237 LED57.1 ; v1(63.4,-9.225) 63.412,-9.237 65.546,-9.237 LED58.1 ; v1(69.3,-9.225) 69.312,-9.237 71.428,-9.237 LED59.1 ; v1(75.025,-9.225) 75.037,-9.237 77.31,-9.237 LED60.1 ; v1(80.9,-9.225) 80.912,-9.237 83.193,-9.237 LED61.1 ; v1(86.8,-9.225) 86.812,-9.237 89.075,-9.237 LED62.1 ; v1(92.735,-9.225) 92.747,-9.237 94.957,-9.237 LED63.1 ; v1@99.233,-9.237 100.84,-9.237 LED64.1@100.875,-9.272
  Bottom Layer w0.6: X2.4 1.005,-33.82 5.85,-28.975 5.85,-13.925 v1(10.55,-9.225) v1(16.4,-9.225) v1(22.2,-9.225) v1(28.05,-9.225) v1(34,-9.225) v1(39.7,-9.225) v1(45.6,-9.225) v1(51.5,-9.225) v1(57.45,-9.225) v1(63.4,-9.225) v1(69.3,-9.225) v1(75.025,-9.225) v1(80.9,-9.225) v1(86.8,-9.225) v1(92.735,-9.225) 98.9,-9.225 v1(99,-9.125)
NetLED65_1: LED65.1 LED66.1 LED67.1 LED68.1 LED69.1 LED70.1 LED71.1 LED72.1 LED73.1 LED74.1 LED75.1 LED76.1 LED77.1 LED78.1 LED79.1 LED80.1 X2.5 | length 149.8
  Top Layer w0.6: v1(10.55,-15.154) 10.585,-15.119 12.605,-15.119 LED65.1 ; v1(16.4,-15.154) 16.435,-15.119 18.487,-15.119 LED66.1 ; v1(22.2,-15.154) 22.235,-15.119 24.369,-15.119 LED67.1 ; v1(28.05,-15.154) 28.085,-15.119 30.252,-15.119 LED68.1 ; v1(34,-15.119) 36.134,-15.119 LED69.1 ; v1(39.7,-15.154) 39.735,-15.119 42.016,-15.119 LED70.1 ; v1(45.6,-15.154) 45.635,-15.119 47.899,-15.119 LED71.1@47.934,-15.154 ; v1(51.5,-15.154) 51.535,-15.119 53.781,-15.119 LED72.1 ; v1(57.525,-15.154) 57.56,-15.119 59.663,-15.119 LED73.1 ; v1(63.4,-15.154) 63.435,-15.119 65.546,-15.119 LED74.1 ; v1(69.3,-15.154) 69.335,-15.119 71.428,-15.119 LED75.1 ; v1(75.025,-15.154) 75.06,-15.119 77.31,-15.119 LED76.1 ; v1(80.9,-15.154) 80.935,-15.119 83.193,-15.119 LED77.1 ; v1(86.8,-15.154) 86.835,-15.119 89.075,-15.119 LED78.1 ; v1(92.7,-15.154) 92.735,-15.119 94.957,-15.119 LED79.1 ; v1(99.035,-15.125) 99.041,-15.119 100.84,-15.119 LED80.1@100.875,-15.154
  Bottom Layer w0.6: X2.5 0.976,-36.134 1.246,-36.134 6.975,-30.405 6.975,-18.729 v1(10.55,-15.154) v1(16.4,-15.154) v1(22.2,-15.154) v1(28.05,-15.154) v1(39.7,-15.154) v1(45.6,-15.154) v1(51.5,-15.154) v1(57.525,-15.154) v1(63.4,-15.154) v1(69.3,-15.154) v1(75.025,-15.154) v1(80.9,-15.154) v1(86.8,-15.154) v1(92.7,-15.154) 99.006,-15.154 v1(99.035,-15.125)
NetLED81_1: LED81.1 LED82.1 LED83.1 LED84.1 LED85.1 LED86.1 LED87.1 LED88.1 LED89.1 LED90.1 LED91.1 LED92.1 LED93.1 LED94.1 LED95.1 LED96.1 X2.6 | length 147.9
  Top Layer w0.6: v1(10.585,-21.037) 10.621,-21.001 12.605,-21.001 LED81.1 ; v1(16.4,-21.037) 16.435,-21.001 18.487,-21.001 LED82.1 ; v1(22.2,-21.037) 22.235,-21.001 24.369,-21.001 LED83.1 ; v1(28.05,-21.037) 28.085,-21.001 30.252,-21.001 LED84.1 ; v1(34,-21.037) 34.035,-21.001 36.134,-21.001 LED85.1 ; v1(39.7,-21.037) 39.735,-21.001 42.016,-21.001 LED86.1 ; v1(45.6,-21.037) 45.635,-21.001 47.899,-21.001 LED87.1@47.934,-21.037 ; v1(51.5,-21.037) 51.535,-21.001 53.781,-21.001 LED88.1 ; v1(57.45,-21.037) 57.485,-21.001 59.663,-21.001 LED89.1 ; v1(63.4,-21.037) 63.435,-21.001 65.546,-21.001 LED90.1 ; v1(69.3,-21.037) 69.335,-21.001 71.428,-21.001 LED91.1 ; v1(75,-21.037) 75.035,-21.001 77.31,-21.001 LED92.1 ; v1(80.9,-21.037) 80.935,-21.001 83.193,-21.001 LED93.1 ; v1(86.8,-21.037) 86.835,-21.001 89.075,-21.001 LED94.1 ; v1(92.747,-21.037) 92.782,-21.001 94.957,-21.001 LED95.1 ; v1(99.035,-21.025) 99.059,-21.001 100.84,-21.001 LED96.1@100.875,-21.037
  Bottom Layer w0.6: X2.6 3.425,-38.9 8.3,-34.025 8.3,-23.322 v1(10.585,-21.037) v1(16.4,-21.037) v1(22.2,-21.037) v1(28.05,-21.037) v1(34,-21.037) v1(39.7,-21.037) v1(45.6,-21.037) v1(51.5,-21.037) v1(57.45,-21.037) v1(63.4,-21.037) v1(69.3,-21.037) v1(75,-21.037) v1(80.9,-21.037) v1(86.8,-21.037) v1(92.747,-21.037) 99.024,-21.037 v1(99.035,-21.025)
NetLED97_1: LED97.1 LED98.1 LED99.1 LED100.1 LED101.1 LED102.1 LED103.1 LED104.1 LED105.1 LED106.1 LED107.1 LED108.1 LED109.1 LED110.1 LED111.1 LED112.1 X2.7 | length 144.2
  Top Layer w0.6: v1(10.621,-26.919) LED97.1 ; v1(16.4,-26.919) LED98.1 ; v1(22.235,-26.919) LED99.1 ; v1(28.062,-26.919) LED100.1 ; v1(34,-26.919) 34.035,-26.884 36.134,-26.884 LED101.1 ; v1(39.7,-26.919) 39.735,-26.884 42.016,-26.884 LED102.1 ; v1(45.625,-26.919) 45.66,-26.884 47.899,-26.884 LED103.1@47.934,-26.919 ; v1(51.5,-26.919) 51.535,-26.884 53.781,-26.884 LED104.1 ; v1(57.45,-26.919) 57.485,-26.884 59.663,-26.884 LED105.1 ; v1(63.4,-26.919) 63.435,-26.884 65.546,-26.884 LED106.1 ; v1(69.3,-26.884) 71.428,-26.884 LED107.1 ; v1(75.025,-26.919) 75.06,-26.884 77.31,-26.884 LED108.1 ; v1(80.912,-26.875) 83.184,-26.875 LED109.1 ; v1(86.8,-26.919) 86.835,-26.884 89.075,-26.884 LED110.1 ; v1(92.747,-26.919) 92.782,-26.884 94.957,-26.884 LED111.1 ; v1(99,-26.875) 99.009,-26.884 100.84,-26.884 LED112.1@100.875,-26.919
  Bottom Layer w0.6: X2.7 3.435,-41.44 9.525,-35.35 9.525,-28.015 v1(10.621,-26.919) v1(16.4,-26.919) v1(22.235,-26.919) v1(28.062,-26.919) v1(34,-26.919) v1(39.7,-26.919) v1(45.625,-26.919) v1(51.5,-26.919) v1(57.45,-26.919) v1(63.4,-26.919) v1(75.025,-26.919) v1(86.8,-26.919) v1(92.747,-26.919) 98.956,-26.919 v1(99,-26.875)
NetLED113_1: LED113.1 LED114.1 LED115.1 LED116.1 LED117.1 LED118.1 LED119.1 LED120.1 LED121.1 LED122.1 LED123.1 LED124.1 LED125.1 LED126.1 LED127.1 LED128.1 X2.8 | length 140.5
  Top Layer w0.6: v1(10.763,-33.619) 11.616,-32.766 12.605,-32.766 LED113.1 ; v1(16.4,-32.8) 16.434,-32.766 18.487,-32.766 LED114.1 ; v1(22.235,-32.801) 22.271,-32.766 24.369,-32.766 LED115.1 ; v1(28.05,-32.8) 28.084,-32.766 30.252,-32.766 LED116.1 ; v1(34,-32.8) 34.034,-32.766 36.134,-32.766 LED117.1 ; v1(39.7,-32.8) 39.734,-32.766 42.016,-32.766 LED118.1 ; v1(45.625,-32.8) 45.659,-32.766 47.899,-32.766 LED119.1 ; v1(51.5,-32.8) 51.534,-32.766 53.781,-32.766 LED120.1 ; v1(57.45,-32.8) 57.484,-32.766 59.663,-32.766 LED121.1 ; v1(63.4,-32.8) 63.434,-32.766 65.546,-32.766 LED122.1 ; v1(69.3,-32.8) 69.334,-32.766 71.428,-32.766 LED123.1 ; v1(75.025,-32.8) 75.059,-32.766 77.31,-32.766 LED124.1 ; v1(80.9,-32.8) 80.934,-32.766 83.193,-32.766 LED125.1 ; v1(86.8,-32.8) 86.834,-32.766 89.075,-32.766 LED126.1 ; v1(92.7,-32.8) 92.734,-32.766 94.957,-32.766 LED127.1 ; v1(99,-32.8) 99.034,-32.766 100.84,-32.766 LED128.1@100.875,-32.801
  Bottom Layer w0.6: X2.8 3.095,-43.98 10.763,-36.312 v1(10.763,-33.619) 11.582,-32.8 v1(16.4,-32.8) v1(28.05,-32.8) v1(34,-32.8) v1(39.7,-32.8) v1(45.625,-32.8) v1(51.5,-32.8) v1(57.45,-32.8) v1(63.4,-32.8) v1(69.3,-32.8) v1(75.025,-32.8) v1(80.9,-32.8) v1(86.8,-32.8) v1(92.7,-32.8) v1(99,-32.8)
NetLED129_1: LED129.1 LED130.1 LED131.1 LED132.1 LED133.1 LED134.1 LED135.1 LED136.1 LED137.1 LED138.1 LED139.1 LED140.1 LED141.1 LED142.1 LED143.1 LED144.1 X2.9 | length 141.6
  Top Layer w0.6: X2.9 -1.975,-44.165 X2.9@-1.735,-44.165 ; v1(10.763,-38.684) LED129.1 ; v1(16.4,-38.684) LED130.1 ; v1(22.2,-38.684) LED131.1 ; v1(28.05,-38.684) 28.085,-38.648 30.252,-38.648 LED132.1 ; v1(34,-38.684) 34.035,-38.648 36.134,-38.648 LED133.1 ; v1(39.7,-38.684) 39.735,-38.648 42.016,-38.648 LED134.1 ; v1(45.6,-38.648) 45.635,-38.684 LED135.1@47.934,-38.684 ; v1(51.5,-38.684) 51.535,-38.648 53.781,-38.648 LED136.1 ; v1(57.676,-38.684) 57.711,-38.648 59.663,-38.648 LED137.1 ; v1(63.4,-38.684) 63.435,-38.648 65.546,-38.648 LED138.1 ; v1(69.3,-38.684) 69.335,-38.648 71.428,-38.648 LED139.1 ; v1(75.025,-38.684) 75.06,-38.648 77.31,-38.648 LED140.1 ; v1(80.912,-38.684) 80.947,-38.648 83.193,-38.648 LED141.1 ; v1(86.8,-38.684) 86.835,-38.648 89.075,-38.648 LED142.1 ; v1(92.7,-38.684) 92.735,-38.648 94.957,-38.648 LED143.1 ; v1(99.035,-38.6) 99.084,-38.648 100.84,-38.648 LED144.1@100.875,-38.684
  Bottom Layer w0.6: X2.9 -1.79,-45.385 -1.025,-46.15 3.296,-46.15 v1(10.763,-38.684) v1(16.4,-38.684) v1(22.2,-38.684) v1(28.05,-38.684) v1(34,-38.684) v1(39.7,-38.684) v1(51.5,-38.684) v1(57.676,-38.684) v1(63.4,-38.684) v1(69.3,-38.684) v1(75.025,-38.684) v1(80.912,-38.684) v1(86.8,-38.684) v1(92.7,-38.684) 98.952,-38.684 v1(99.035,-38.6)
NetLED145_1: LED145.1 LED146.1 LED147.1 LED148.1 LED149.1 LED150.1 LED151.1 LED152.1 LED153.1 LED154.1 LED155.1 LED156.1 LED157.1 LED158.1 LED159.1 LED160.1 X2.10 | length 144.4
  Top Layer w0.6: X2.10 -2.965,-41.44 -3.575,-42.05 -3.575,-44.975 -1.5,-47.05 4.85,-47.05 7.225,-44.675 v1(10.55,-44.675) ; v1@10.816,-44.531 12.605,-44.531 LED145.1 ; v1(16.4,-44.566) 16.435,-44.531 18.487,-44.531 LED146.1 ; v1(22.2,-44.566) LED147.1 ; v1(28.062,-44.566) LED148.1 ; v1(34,-44.531) 36.134,-44.531 LED149.1 ; v1(39.7,-44.566) LED150.1 ; v1(45.6,-44.566) LED151.1@47.934,-44.566 ; v1(51.5,-44.566) LED152.1 ; v1(57.73,-44.566) LED153.1 ; v1(63.435,-44.566) LED154.1 ; v1(69.3,-44.566) LED155.1 ; v1(75.06,-44.531) 75.06,-44.566 LED156.1 ; v1(80.912,-44.566) 80.947,-44.531 83.193,-44.531 LED157.1 ; v1(86.8,-44.566) LED158.1 ; v1(92.782,-44.531) 92.818,-44.566 LED159.1 ; v1(99.059,-44.566) 99.095,-44.531 100.84,-44.531 LED160.1@100.875,-44.566
  Bottom Layer w0.6: v1(10.55,-44.675) 10.675,-44.55 10.691,-44.566 v1(16.4,-44.566) v1(22.2,-44.566) v1(28.062,-44.566) v1(39.7,-44.566) v1(45.6,-44.566) v1(51.5,-44.566) v1(57.73,-44.566) v1(63.435,-44.566) v1(69.3,-44.566) v1(80.912,-44.566) v1(86.8,-44.566) v1(99.059,-44.566)
NetLED161_1: LED161.1 LED162.1 LED163.1 LED164.1 LED165.1 LED166.1 LED167.1 LED168.1 LED169.1 LED170.1 LED171.1 LED172.1 LED173.1 LED174.1 LED175.1 LED176.1 X2.11 | length 149.4
  Top Layer w0.6: X2.11 -4.875,-41.985 -4.875,-46.125 -0.552,-50.448 v1(10.763,-50.448) 10.798,-50.413 12.605,-50.413 LED161.1 ; v1(16.4,-50.448) 16.435,-50.413 18.487,-50.413 LED162.1 ; v1(22.235,-50.448) LED163.1 ; v1(28.05,-50.448) LED164.1 ; v1(34,-50.448) LED165.1 ; v1(39.7,-50.413) 39.735,-50.448 LED166.1 ; v1(45.6,-50.413) 47.899,-50.413 LED167.1@47.934,-50.448 ; v1(51.535,-50.448) LED168.1 ; v1(57.676,-50.413) 59.663,-50.413 LED169.1 ; v1(63.435,-50.413) 65.546,-50.413 LED170.1 ; v1(69.3,-50.448) LED171.1 ; v1(75.06,-50.448) 75.096,-50.413 77.31,-50.413 LED172.1 ; v1(80.912,-50.448) 80.947,-50.413 83.193,-50.413 LED173.1 ; v1(86.8,-50.448) 86.835,-50.413 89.075,-50.413 LED174.1 ; v1(92.7,-50.448) 92.735,-50.413 94.957,-50.413 LED175.1 ; v1(99,-50.448) 99.035,-50.413 100.84,-50.413 LED176.1@100.875,-50.448
  Bottom Layer w0.6: v1(10.763,-50.448) v1(16.4,-50.448) v1(22.235,-50.448) v1(28.05,-50.448) v1(34,-50.448) v1(51.535,-50.448) v1(69.3,-50.448) v1(75.06,-50.448) v1(80.912,-50.448) v1(86.8,-50.448) v1(92.7,-50.448) v1(99,-50.448)
NetLED177_1: LED177.1 LED178.1 LED179.1 LED180.1 LED181.1 LED182.1 LED183.1 LED184.1 LED185.1 LED186.1 LED187.1 LED188.1 LED189.1 LED190.1 LED191.1 LED192.1 X2.12 | length 157.4
  Top Layer w0.6: X2.12 -2.185,-36.36 -6.575,-40.75 -6.575,-46.7 3.056,-56.331 v1(10.763,-56.331) 10.798,-56.295 12.605,-56.295 LED177.1 ; v1(16.4,-56.331) 16.435,-56.295 18.487,-56.295 LED178.1 ; v1(22.2,-56.331) 22.235,-56.295 24.369,-56.295 LED179.1 ; v1(28.062,-56.331) 28.097,-56.295 30.252,-56.295 LED180.1 ; v1(34,-56.331) 34.035,-56.295 36.134,-56.295 LED181.1 ; v1(39.7,-56.331) 39.735,-56.295 42.016,-56.295 LED182.1 ; v1(45.659,-56.295) 47.899,-56.295 LED183.1@47.934,-56.331 ; v1(51.535,-56.295) 53.781,-56.295 LED184.1 ; v1(57.676,-56.295) 59.663,-56.295 LED185.1 ; v1(63.4,-56.295) 65.546,-56.295 LED186.1 ; v1(69.334,-56.295) 71.428,-56.295 LED187.1 ; v1(75.025,-56.295) 75.06,-56.331 LED188.1 ; v1(80.934,-56.331) 80.969,-56.295 83.193,-56.295 LED189.1 ; v1(86.8,-56.331) 86.835,-56.295 89.075,-56.295 LED190.1 ; v1(92.7,-56.331) 92.735,-56.295 94.957,-56.295 LED191.1 ; v1(99.059,-56.331) 99.095,-56.295 100.84,-56.295 LED192.1@100.875,-56.331
  Bottom Layer w0.6: v1(10.763,-56.331) v1(16.4,-56.331) v1(99.059,-56.331)
NetLED193_1: LED193.1 LED194.1 LED195.1 LED196.1 LED197.1 LED198.1 LED199.1 LED200.1 LED201.1 LED202.1 LED203.1 LED204.1 LED205.1 LED206.1 LED207.1 LED208.1 X2.13 | length 158.9
  Top Layer w0.6: v1(10.672,-62.213) 10.707,-62.178 12.605,-62.178 LED193.1 ; v1(16.4,-62.213) 16.435,-62.178 18.487,-62.178 LED194.1 ; v1(22.235,-62.213) LED195.1 ; v1(28.05,-62.178) 28.085,-62.213 LED196.1 ; v1(34.035,-62.178) 36.134,-62.178 LED197.1 ; v1(39.735,-62.178) 42.016,-62.178 LED198.1 ; v1(45.635,-62.178) 47.899,-62.178 LED199.1@47.934,-62.213 ; v1(51.535,-62.178) 53.781,-62.178 LED200.1 ; v1(57.676,-62.178) 59.663,-62.178 LED201.1 ; v1(63.435,-62.213) LED202.1 ; v1(69.3,-62.178) 71.428,-62.178 LED203.1 ; v1(75.025,-62.213) 75.06,-62.178 77.31,-62.178 LED204.1 ; v1(80.912,-62.213) 80.947,-62.178 83.193,-62.178 LED205.1 ; v1(86.8,-62.213) 86.835,-62.178 89.075,-62.178 LED206.1 ; v1(92.782,-62.213) 92.818,-62.178 94.957,-62.178 LED207.1 ; v1(99.035,-62.213) 99.071,-62.178 100.84,-62.178 LED208.1@100.875,-62.213
  Bottom Layer w0.6: X2.13 -3.95,-35.98 -3.95,-47.591 v1(10.672,-62.213) v1(16.4,-62.213) v1(99.035,-62.213)
NetLED209_1: LED209.1 LED210.1 LED211.1 LED212.1 LED213.1 LED214.1 LED215.1 LED216.1 LED217.1 LED218.1 LED219.1 LED220.1 LED221.1 LED222.1 LED223.1 LED224.1 X2.14 | length 169.2
  Top Layer w0.6: v1(10.672,-68.095) 10.798,-68.095 10.833,-68.06 12.605,-68.06 LED209.1 ; v1(16.4,-68.095) 16.435,-68.06 18.487,-68.06 LED210.1 ; v1(22.2,-68.06) 22.235,-68.095 LED211.1 ; v1(28.062,-68.06) 30.252,-68.06 LED212.1 ; v1(34,-68.095) LED213.1 ; v1(39.735,-68.06) 39.771,-68.095 LED214.1 ; v1(45.6,-68.095) LED215.1@47.934,-68.095 ; v1(51.535,-68.095) 51.571,-68.06 53.515,-68.06 LED216.1@53.816,-67.759 ; LED216.1 LED216.1@53.816,-67.759 ; LED216.1@53.85,-67.725 LED216.1@53.816,-67.759 ; v1(57.676,-68.06) 57.711,-68.095 LED217.1 ; v1(63.435,-68.06) 65.546,-68.06 LED218.1 ; v1(69.3,-68.06) 71.428,-68.06 LED219.1 ; v1(75.025,-68.095) 75.06,-68.06 77.31,-68.06 LED220.1 ; v1(80.912,-68.095) LED221.1 ; v1(86.8,-68.095) 86.835,-68.06 89.075,-68.06 LED222.1 ; v1(92.7,-68.095) 92.735,-68.06 94.957,-68.06 LED223.1 ; v1(99.059,-67.95) 99.181,-67.95 99.291,-68.06 100.84,-68.06 LED224.1@100.875,-68.095
  Bottom Layer w0.6: X2.14 -5.375,-34.865 -5.375,-52.049 v1(10.672,-68.095) v1(16.4,-68.095) 28.062,-68.095 v1(34,-68.095) v1(45.6,-68.095) v1(51.535,-68.095) v1(75.025,-68.095) v1(80.912,-68.095) v1(86.8,-68.095) v1(92.7,-68.095) 98.914,-68.095 v1(99.059,-67.95)
NetLED225_1: LED225.1 LED226.1 LED227.1 LED228.1 LED229.1 LED230.1 LED231.1 LED232.1 LED233.1 LED234.1 LED235.1 LED236.1 LED237.1 LED238.1 LED239.1 LED240.1 X2.15 | length 178.4
  Top Layer w0.6: v1(10.672,-73.978) 10.707,-73.942 12.605,-73.942 LED225.1 ; v1(16.4,-73.978) 16.435,-73.942 18.487,-73.942 LED226.1 ; v1(22.2,-73.942) 24.369,-73.942 LED227.1 ; v1(28.05,-73.978) LED228.1 ; v1(34.035,-73.978) LED229.1 ; v1(39.771,-73.942) 39.806,-73.978 LED230.1 ; v1(45.6,-73.978) 45.635,-73.942 47.899,-73.942 LED231.1@47.934,-73.978 ; v1(51.535,-73.9) 51.578,-73.942 53.781,-73.942 LED232.1 ; v1(57.375,-74.025) 57.458,-73.942 59.663,-73.942 LED233.1 ; v1(63.4,-73.978) 63.435,-73.942 65.546,-73.942 LED234.1 ; v1(69.334,-73.9) 69.377,-73.942 71.428,-73.942 LED235.1 ; v1(75.025,-73.9) 75.096,-73.9 75.138,-73.942 77.31,-73.942 LED236.1 ; v1(80.969,-73.942) 83.193,-73.942 LED237.1 ; v1(86.8,-73.978) 86.835,-73.942 89.075,-73.942 LED238.1 ; v1(92.818,-73.978) 92.853,-73.942 94.957,-73.942 LED239.1 ; v1(99.059,-73.9) 99.102,-73.942 100.84,-73.942 LED240.1@100.875,-73.978
  Bottom Layer w0.6: X2.15 -2.165,-28.74 -6.525,-33.1 -6.525,-56.781 v1(10.672,-73.978) v1(16.4,-73.978) 98.981,-73.978 v1(99.059,-73.9)
NetLED241_1: LED241.1 LED242.1 LED243.1 LED244.1 LED245.1 LED246.1 LED247.1 LED248.1 LED249.1 LED250.1 LED251.1 LED252.1 LED253.1 LED254.1 LED255.1 LED256.1 X2.16 | length 187.4
  Top Layer w0.6: v1(10.672,-79.86) LED241.1 ; v1(16.4,-79.86) 16.435,-79.825 18.487,-79.825 LED242.1 ; v1(22.2,-79.86) 22.235,-79.825 24.369,-79.825 LED243.1 ; v1(28.05,-79.86) 28.085,-79.825 30.252,-79.825 LED244.1 ; v1(34,-79.86) 34,-79.825 36.134,-79.825 LED245.1 ; v1(39.771,-79.86) 39.806,-79.825 42.016,-79.825 LED246.1 ; v1(45.659,-79.825) 47.899,-79.825 LED247.1@47.934,-79.86 ; v1(51.571,-79.825) 53.781,-79.825 LED248.1 ; v1(57.676,-79.825) 59.663,-79.825 LED249.1 ; v1(63.4,-79.825) 65.546,-79.825 LED250.1 ; v1(69.3,-79.825) 69.3,-79.86 69.335,-79.825 71.428,-79.825 LED251.1 ; v1(75.025,-79.86) 75.06,-79.825 77.31,-79.825 LED252.1 ; v1(80.947,-79.825) 83.193,-79.825 LED253.1 ; v1(86.835,-79.825) 89.075,-79.825 LED254.1 ; v1(92.7,-79.825) 94.957,-79.825 LED255.1 ; v1(99.035,-79.86) 99.071,-79.825 100.84,-79.825 LED256.1@100.875,-79.86
  Bottom Layer w0.6: X2.16 -7.725,-32.135 -7.725,-61.463 v1(10.672,-79.86) v1(16.4,-79.86) v1(99.035,-79.86)

## Silkscreen, mask and mechanical layers (free items; w line width, h text height)
Top Overlay:
  text "ETML-ES" at 28.625,-91.325 h4
  text "2008_2_A" at 28.65,-97.775 h3
Board Outline (ES):
  lines w0.4: -8.5,-69 23.5,-101 91.5,-101 123.5,-69 123.5,-1 91.5,31 23.5,31 7.5,15 -8.5,-1 -8.5,-69 ; -8.5,-69 -8.5,-69